# Altium PCB Termal controller.PcbDoc
Units mm, origin at the board's own origin, x right, y up, seen from the top; angles counter-clockwise.
Board outline 68.51 x 45.45 mm, 4 copper layers (Top Layer 1, Layer1, Layer 2, Bottom Layer 1), stack 0.603 mm thick; 72 components, 58 nets, 262 pads, 80 vias.
Unrouted connection lines stored in the file: 2.
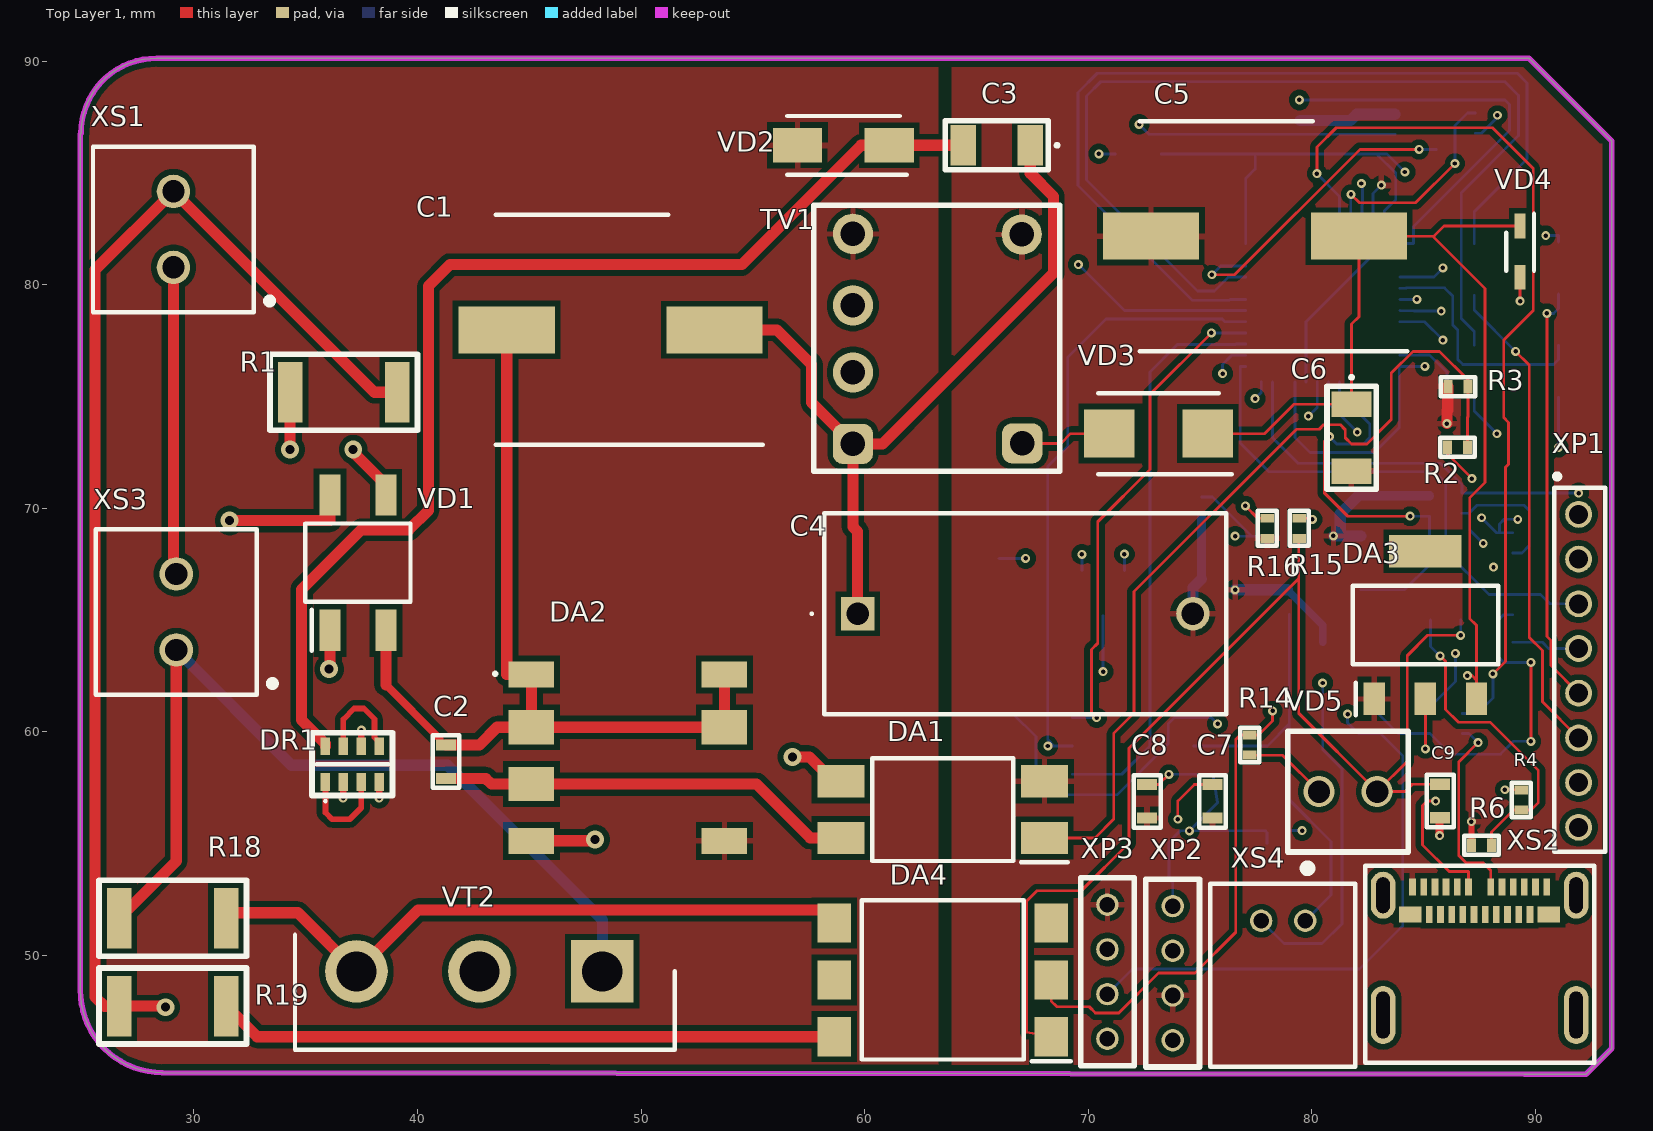
[diagram p0: Top Layer 1 view]
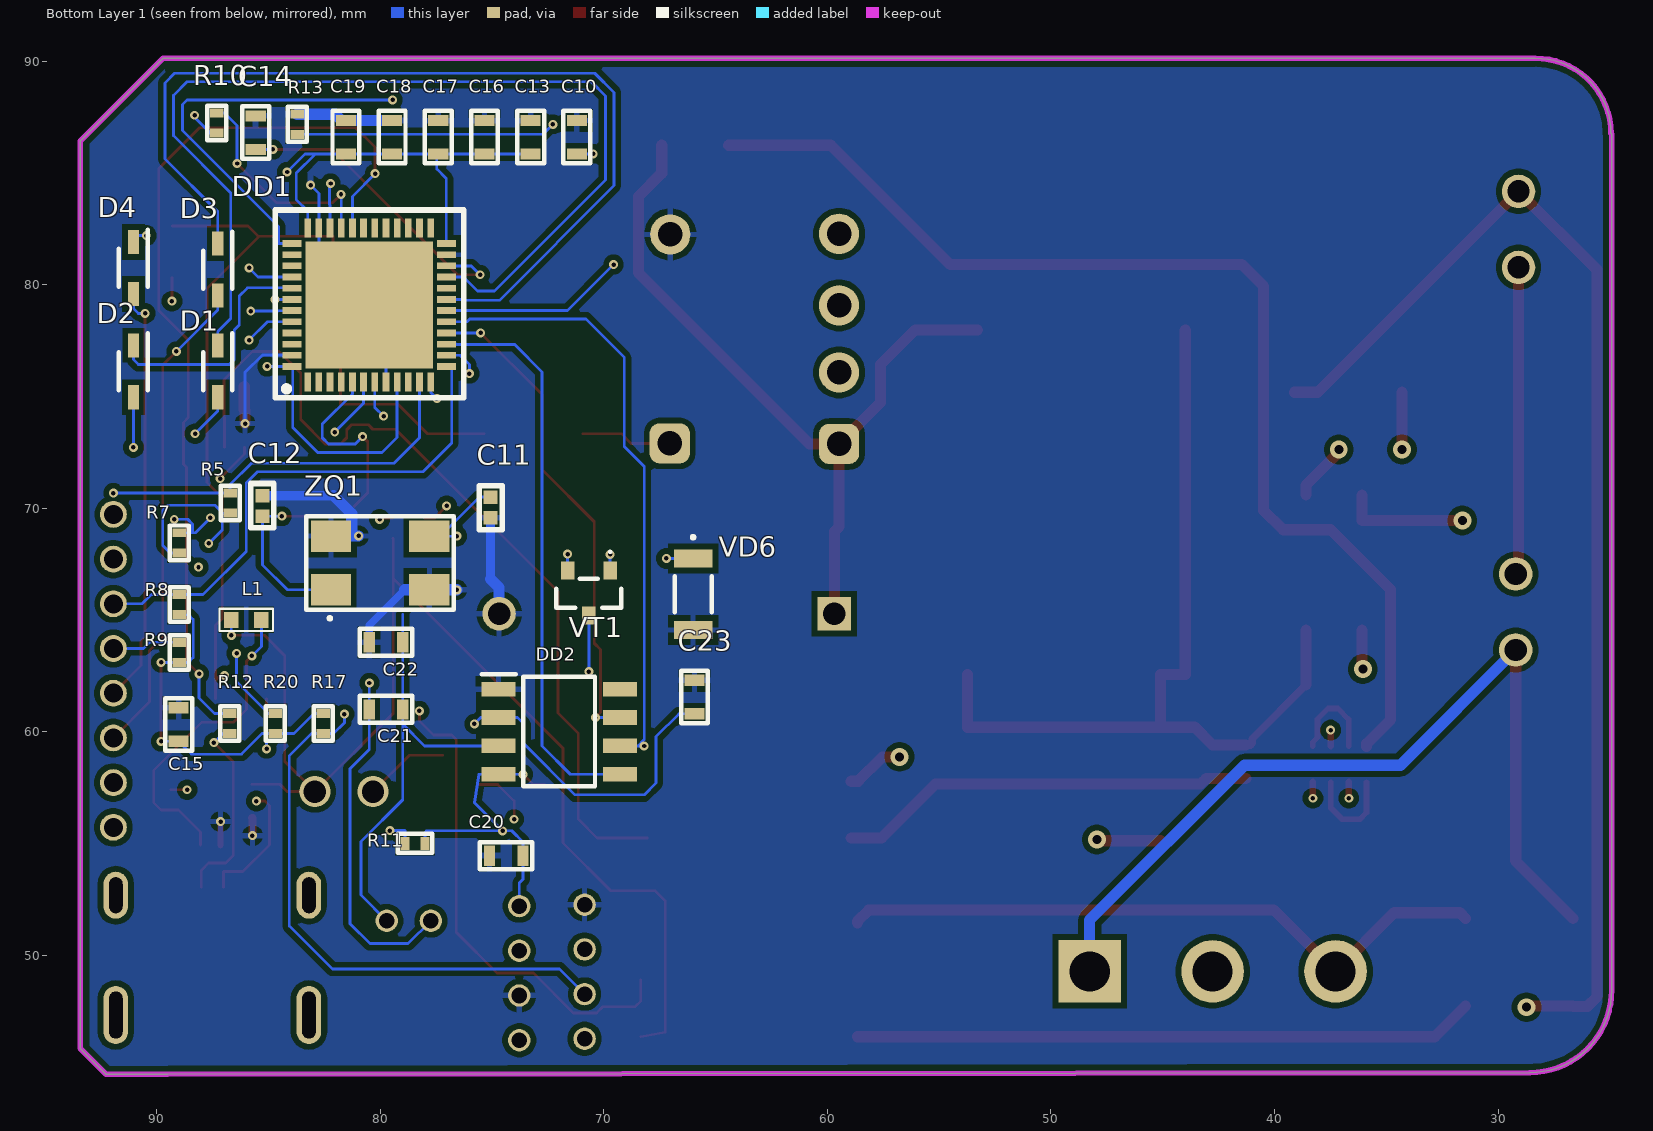
[diagram p1: Bottom Layer 1 view, seen from below]
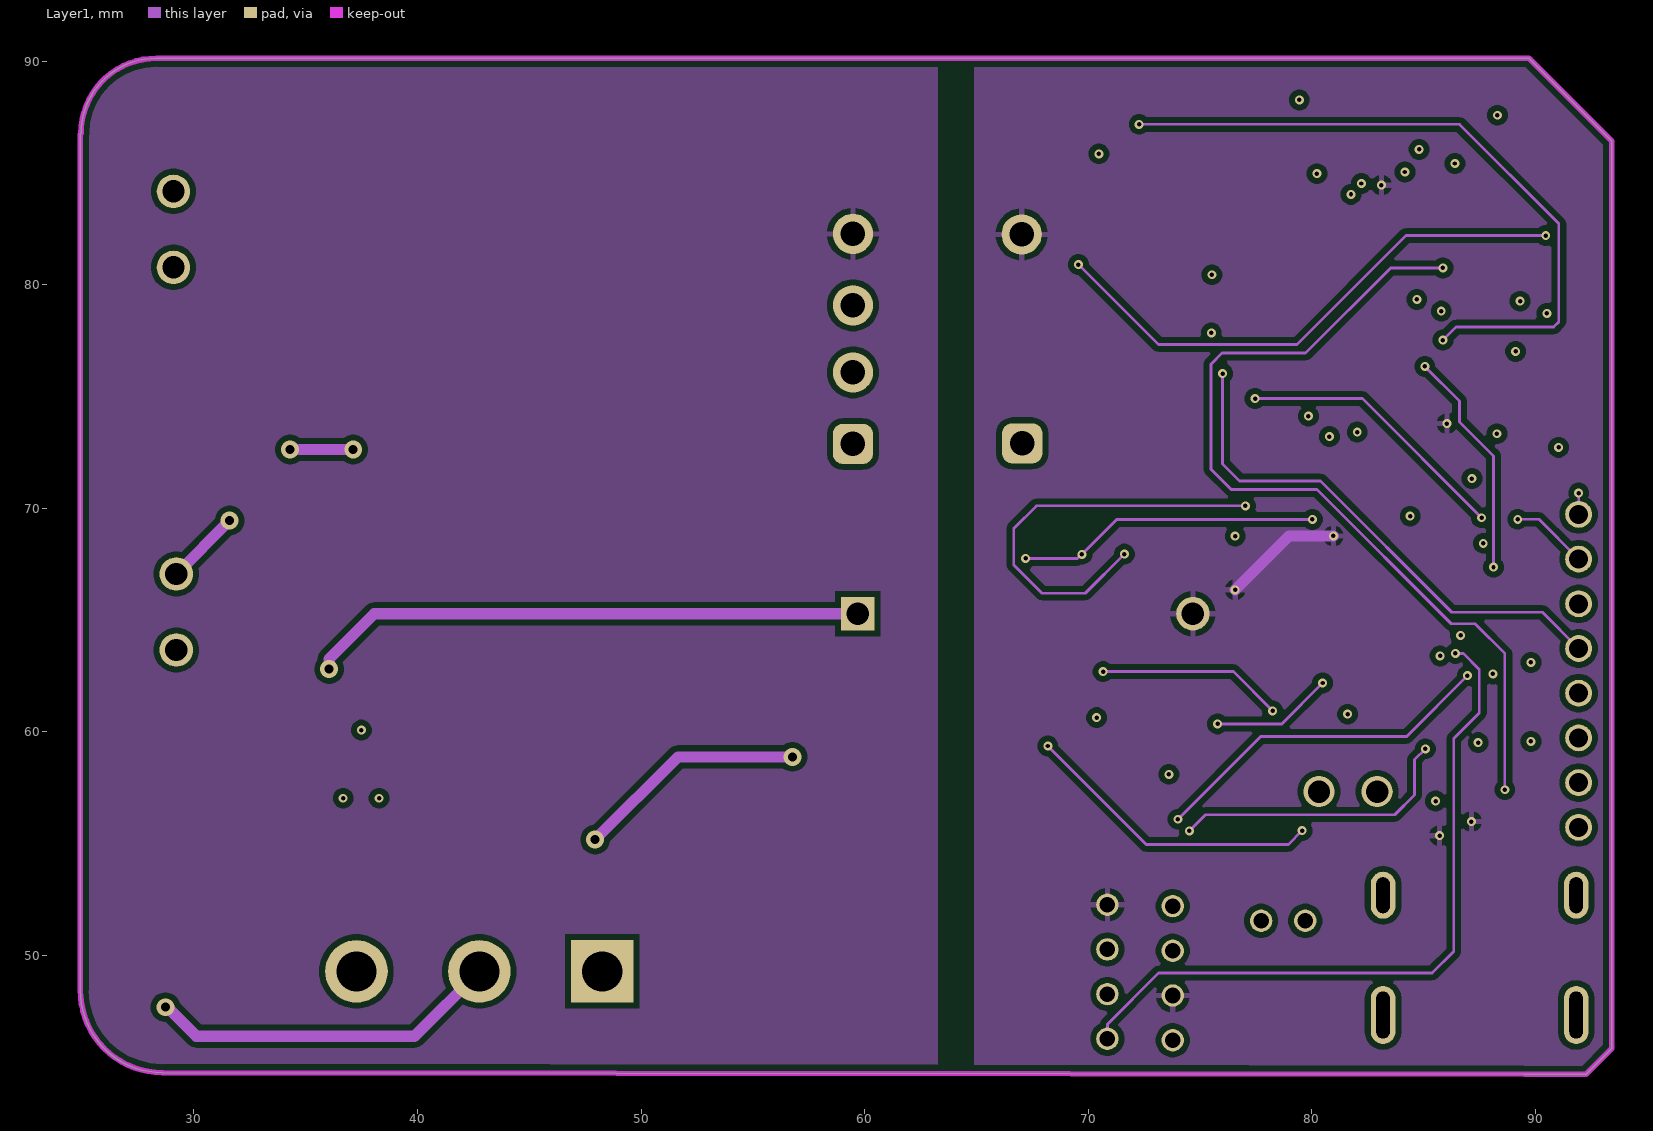
[diagram p2: Layer1]
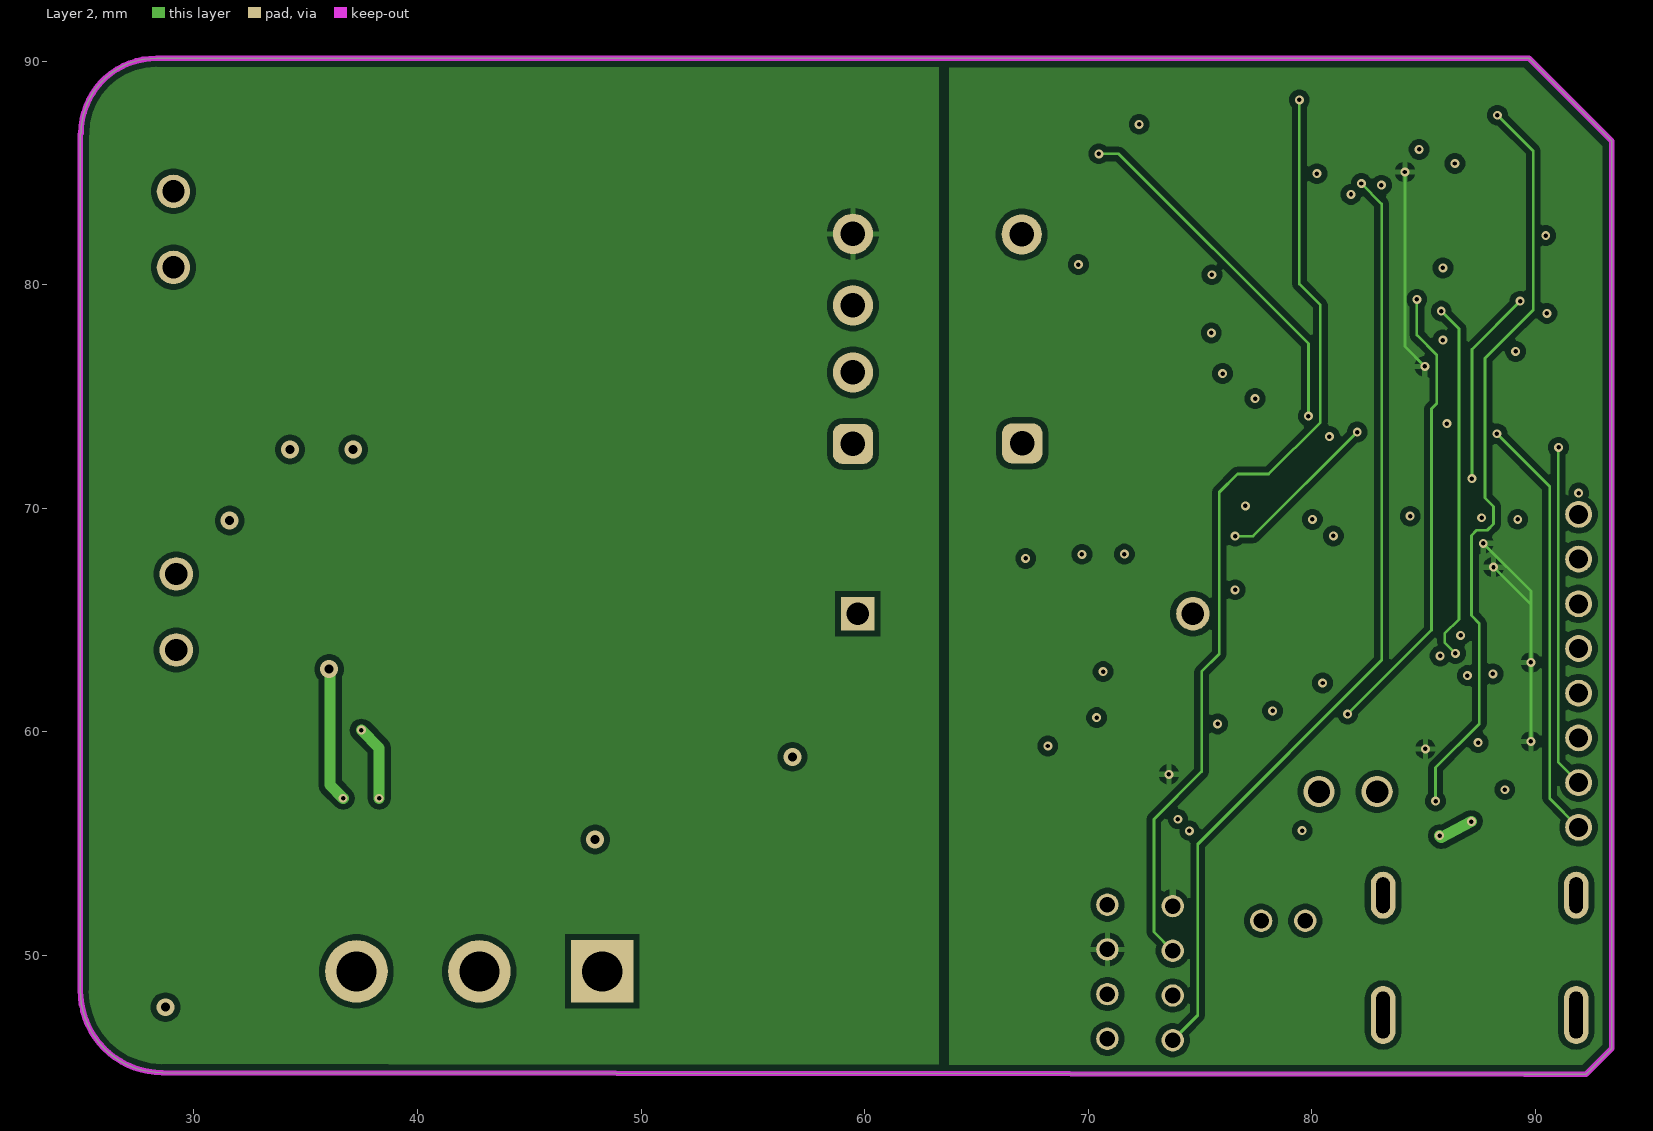
[diagram p3: Layer 2]
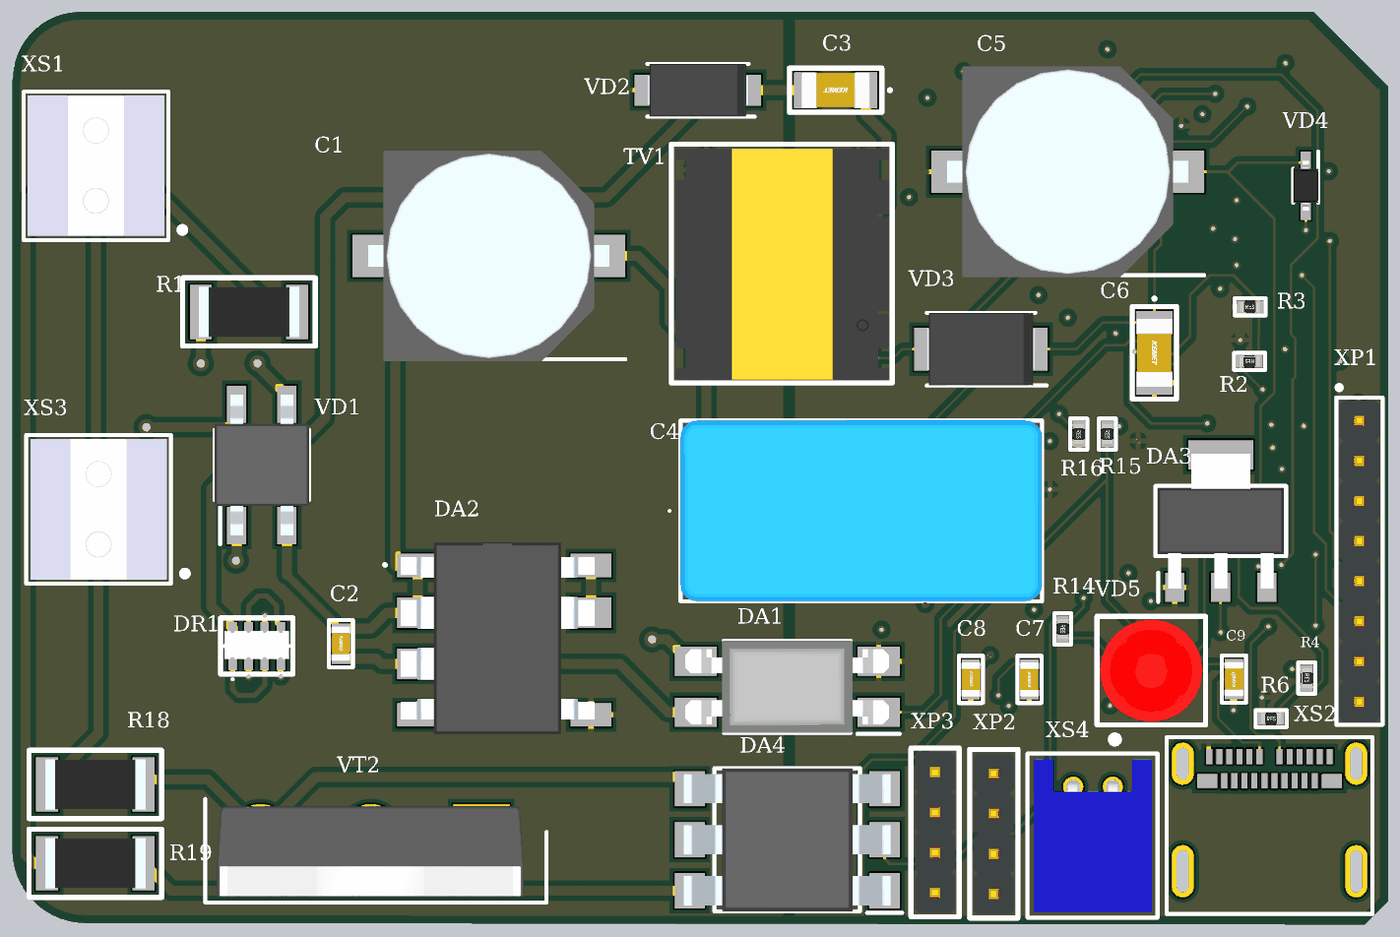
[diagram p4: 3D render of the assembled board from above, using the file's embedded part models]
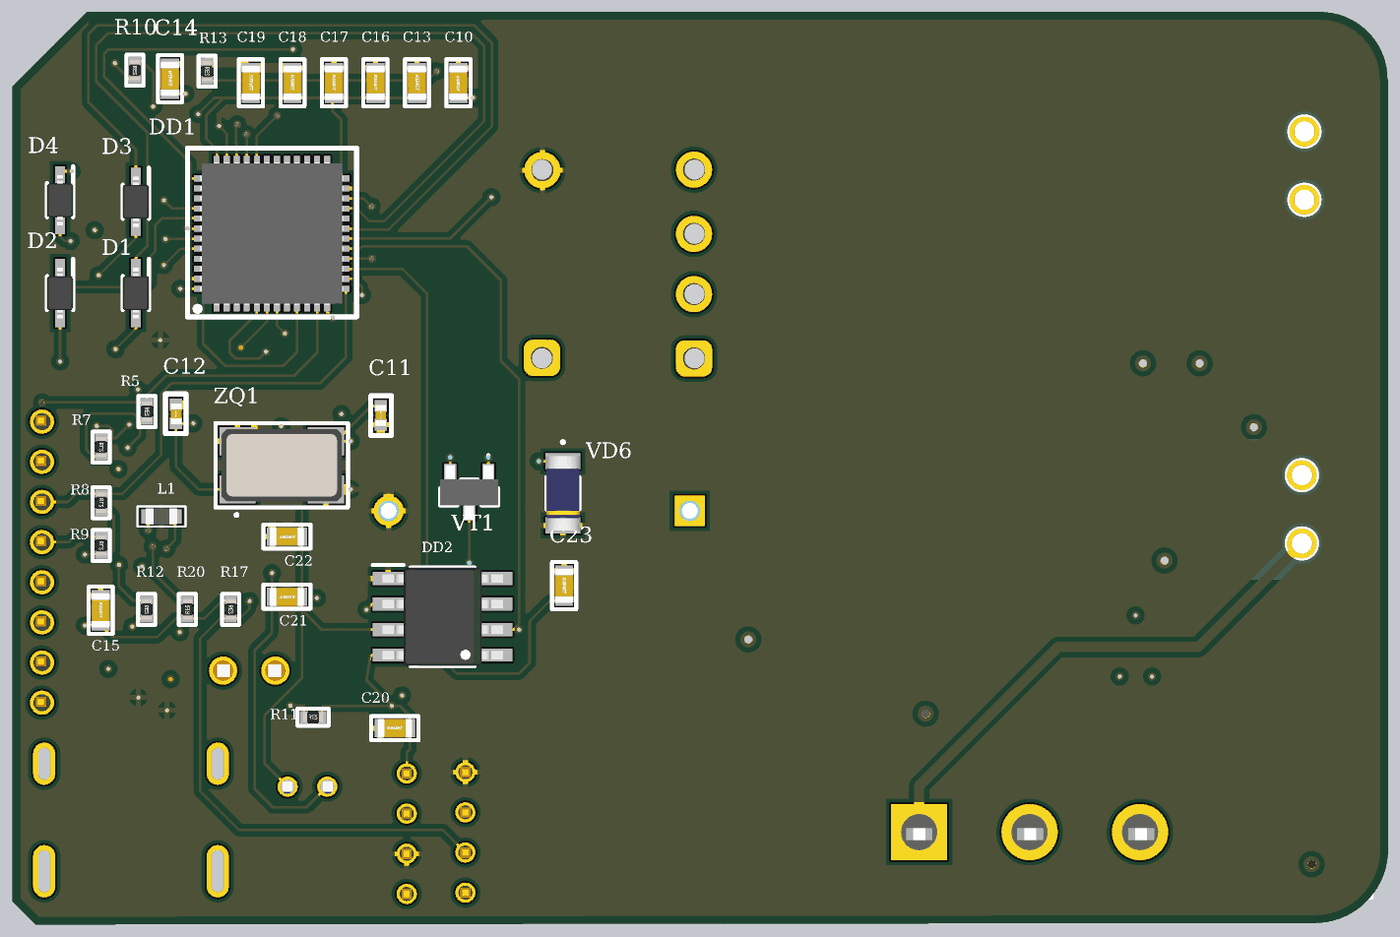
[diagram p5: 3D render of the assembled board from below, using the file's embedded part models]

## Layer stack, top to bottom
Top Solder: solder mask 0.0102, Solder Resist, Dk 3.5
Top Layer 1: signal copper 0.035
Dielectric 2: prepreg 0.0711, PP-006, Dk 4.1
Layer1: signal copper 0.0356
Dielectric 1: dielectric 0.32, FR-4, Dk 4.8
Layer 2: signal copper 0.0356
Dielectric 3: prepreg 0.0711, PP-006, Dk 4.1
Bottom Layer 1: signal copper 0.035
Bottom Solder: solder mask 0.0102, Solder Resist, Dk 3.5

## Board outline
28.58,44.749 cw(c28.58,48.409) 24.92,48.439 24.917,86.742 24.95,86.775 cw(c28.3,86.775) 28.328,90.125 89.55,90.125 89.725,90.125 93.425,86.425 93.425,45.825 92.275,44.675 89.522,44.675

## Design rules (kind name [scope] priority, off if disabled: settings)
Clearance "Clearance 220VAC" [OnLayer('Top Layer') vs (InComponent('C1') OR InComponent('C2') OR InComponent('C3') OR InComponent('C4') OR InComponent('DA1') OR InComponent('DA2') OR InComponent('DR1') OR InComponent('R1') OR InComponent('VD1') OR InComponent('VD2'))] p1: gap=2 ignorepadtopadclearanceinfootprint=TRUE
Clearance Clearance_1 [All] p2: gap=0.254 ignorepadtopadclearanceinfootprint=TRUE except(0: Arc-Hole Track-Hole SMDPad-Hole THPad-Hole Via-Hole Fill-Hole Poly-Hole Region-Hole Text-Hole)
PolygonConnect [All] p1: connectstyle=Relief reliefconductorwidth=0.254 reliefentries=4 polygonreliefangle="90 Angle" airgapwidth=0.254
RoutingVias [All] p1: holewidth=0.2 width=0.4 viastyle="Through Hole" minholewidth=0.2 minwidth=0.4 maxholewidth=0.2 maxwidth=0.4
SMDNeckDown [All] p1: percent=70.000
SolderMaskExpansion [All] p1: expansion=0.102 istentingtop=FALSE
UnRoutedNet [All] p1: checkbadconnections=TRUE
Width "Width VAC" [(InNet('NetC1_1') OR InNet('NetC1_2') OR InNet('NetC2_2') OR InNet('NetC3_2') OR InNet('NetDA1_3') OR InNet('NetDA2_5') OR InNet('NetR1_1') OR InNet('NetR1_2') OR InNet('NetVD1_4') OR InNet('NetDR1_1') OR InNet('NetDR1_4') OR InNet('NetDR1_5') OR InNet('DGND') OR InNet ('NetDA4_6')OR InNet ('NetR15_2'))] p1: maxlimit=0.5 minlimit=0.125 preferedwidth=0.5
Width Width_1 [All] p2: maxlimit=0.125 minlimit=0.125 preferedwidth=0.125
29 further rules are at their usual default settings.

## Classes and differential pairs
component class Power: C1 C2 C3 C4 C5 C6 C7 C8 DA1 DA2 DA3 DR1 R1 R2 R3 TV1 VD1 VD2 VD3 VD4 XS1
component class MCU: C9 C12 C13 C16 C18 C20 C21 C22 C23 D1 D2 D3 D4 DA4 DD1 DD2 L1 R4 R7 R8 R9 R11 R12 R15 R16 R18 R19 R20 VD5 VD6 VT1 VT2 XP1 XP2 XP3 XS2 XS3 XS4 ZQ1

## Components (designator, comment, footprint, x,y, rotation, side; value= is the part's Value field where it differs from the comment)
C1 "EEV-EB2G4R7Q" CAPAE1030X1700N 48.641,77.978 r180 top locked
C2 "06035C104JAT2A" С0603 41.275,59.412 r270 top locked value="0.1 мкФ"
C3 "CC1206KKX7RBBB222" C1206 65.913,86.233 r180 top locked value="2.2 нФ"
C4 "Конденсатор неполярный" B81123C1472M000 59.69,65.278 r0 top locked value="4.7 нФ"
C5 "EEV-EB2G4R7Q" CAPAE1030X1700N 77.47,82.169 r180 top locked
C6 "CC1206KKX5R7BB226" C1206 81.788,73.152 r270 top locked value=22
C7 "06035C104JAT2A" С0603 75.565,56.134 r90 top locked value="0.1 мкФ"
C8 "06035C104JAT2A" С0603 72.644,57.634 r270 top locked value="0.1 мкФ"
C9 "06035C104JAT2A" С0603 85.75,56.15 r90 top locked value="0.1 мкФ"
C10 "06035C104JAT2A" С0603 71.212,85.847 r90 bottom locked value="0.1 мкФ"
C11 "CC0603JRNPO9BN160" C0402 75.075,70.035 r270 bottom locked value="16 пФ"
C12 "CC0603JRNPO9BN160" C0402 85.275,70.1 r90 bottom locked value="16 пФ"
C13 "06035C104JAT2A" С0603 73.278,87.347 r270 bottom locked value="10 кОм"
C14 "06035C104JAT2A" С0603 85.575,87.55 r270 bottom locked value="4.7 мкФ"
C15 "06035C104JAT2A" С0603 89.027,61.071 r270 bottom locked value="10 кОм"
C16 "06035C104JAT2A" С0603 75.345,87.347 r270 bottom locked value="10 кОм"
C17 "06035C104JAT2A" С0603 77.411,87.347 r270 bottom locked value="10 кОм"
C18 "06035C104JAT2A" С0603 79.477,87.347 r270 bottom locked value="10 кОм"
C19 "06035C104JAT2A" С0603 81.544,87.347 r270 bottom locked value="10 кОм"
C20 "06035C104JAT2A" С0603 75.125,54.45 r180 bottom locked value="0.1 мкФ"
C21 "06035C104JAT2A" С0603 79,61 r0 bottom locked value="0.1 мкФ"
C22 "06035C104JAT2A" С0603 79,64 r0 bottom locked value="0.1 мкФ"
C23 "06035C104JAT2A" С0603 65.95,62.3 r270 bottom locked value="0.1 мкФ"
D1 "BAT42WS-7-F" SOD2513X120N 87.275,76.125 r270 bottom locked
D2 "BAT42WS-7-F" SOD2513X120N 91.05,76.125 r270 bottom locked
D3 "BAT42WS-7-F" SOD2513X120N 87.275,80.675 r270 bottom locked
D4 "BAT42WS-7-F" SOD2513X120N 91.05,80.75 r270 bottom locked
DA1 "LTV-817S-TA1" SOP254P1016X400-4N 63.5,56.515 r180 top locked
DA2 "LNK364GN-TL" LNK364GNTL 49.414,58.928 r270 top locked
DA3 "AMS1117-3.3" SOT229P700X180-4N 85.09,64.77 r90 top locked
DA4 "EL3063S_TA_" SOP254P1030X460-6N 63.5,48.895 r180 top
DD1 "STM32F411CEU6" QFN50P700X700X60-49N-D 80.502,79.089 r90 bottom locked
DD2 "MAX6675ISA" SOIC127P600X175-8N 72,60 r180 bottom locked
DR1 "YC164-JR-0727KL" CAT161000F4 37.084,58.547 r0 top locked value=27K
L1 "BLM18AG102SN1D" BLM18SP221SN1B 86,65 r0 bottom locked
R1 "CRGS2010J10R" RESC5025X65N 36.703,75.184 r180 top locked value=12
R2 "RC0402FR-07390RL" R0402 86.975,72.725 r180 top locked value=390
R3 "RC0402FR-07680RL" R0402 86.095,75.438 r0 top locked value=680
R4 "R0402" R0402 89.375,57.4 r270 top locked value=100
R5 "R0402" R0402 86.725,70.675 r270 bottom locked value="10 кОм"
R6 "R0402" R0402 87.15,54.925 r0 top locked value=10K
R7 "R0402" R0402 89,68.9 r270 bottom locked value="10 кОм"
R8 "R0402" R0402 89,66.134 r270 bottom locked value="10 кОм"
R9 "R0402" R0402 89,64 r270 bottom locked value="10 кОм"
R10 "R0402" R0402 87.325,87.675 r270 bottom locked value="10 кОм"
R11 "R0402" R0402 78.9,55 r180 bottom locked value="10 кОм"
R12 "R0402" R0402 86.741,60.817 r270 bottom locked value="10 кОм"
R13 "R0402" R0402 83.725,87.625 r270 bottom locked value="10 кОм"
R14 "R0402" R0402 77.225,59.849 r270 top locked value=10K
R15 "R0402" R0402 79.444,69.55 r270 top locked value=10K
R16 "R0402" R0402 78.019,69.55 r270 top locked value=1K
R17 "R0402" R0402 82.55,60.817 r270 bottom locked value="10 кОм"
R18 "RC2010JK-07330RL" RESC5025X65N 29.05,51.65 r180 top locked value=330
R19 "RC2010FK-07100RL" RESC5025X65N 29.05,47.725 r180 top locked value=100
R20 "R0402" R0402 84.709,59.917 r90 bottom locked value="10 кОм"
TV1 "EE10-A1" EE10-A1 56.531,83.648 r270 top locked
VD1 "MB6S" SOP250P700X190-4N 37.338,67.564 r90 top locked
VD2 "RS1M" DIOM5026X262N 59.055,86.233 r180 top locked
VD3 "NRVBSS26NT3G" DIOM5436X247N 73.152,73.332 r180 top locked
VD4 "BZX384-C5V6" SOD2512X110N 89.325,81.475 r270 top locked
VD5 "LED" "LED Red 5 мм" 81.931,57.42 r270 top locked
VD6 "ZMM5225B" TMMDB3TG 66.01,66.151 r270 bottom locked
VT1 "MMBT5551" MMBT5551 70.675,66.2 r0 bottom locked
VT2 "BTA24-800CWRG" TO255P460X1020X2005-3P 48.27,49.276 r180 top locked
XP1 "PLS3" PLS8 91.948,69.722 r0 top locked
XP2 "Разъем SWD" PLS4 73.787,52.197 r0 top locked
XP3 "Разъем I2C (дисплей)" PLS4 70.866,52.26 r0 top locked
XS1 "S2B-PH-K-S" ED350V-02P 29.083,84.972 r0 top locked
XS2 "Разъем USB TYPE-C" "Разъем USB TYPE-C, 1054500101" 83.197,47.325 r0 top locked
XS3 "Нагрузка" ED350V-02P 29.21,67.856 r0 top locked
XS4 "Термопара" S2B-PH-K-S 81.668,51.189 r270 top locked
ZQ1 "ABMM2-8.000MHZ-E2-T" ABMM2 80.01,67.548 r180 bottom locked

## Footprints (in the part's own frame and the unit in brackets; to place one, negate y for a bottom-side part, rotate by r counter-clockwise, add the part's x,y. Pads: shape width x height; smd on the part's side, far side on the other; paste and mask are expansions set on the pad)
ABMM2 [mm]
  rect 1.8x1.4 smd: 1(-2.2,-1.2) 2(2.2,-1.2) 3(2.2,1.2) 4(-2.2,1.2)
  silkscreen extent -3.3,-2.52 3.3,2.1, body extent -3,-1.8 3,1.8, height 1.2
B81123C1472M000 [mm]
  rect 1.5x1.5 hole 1: 1(0,0)
  round 1.5 hole 1: 2(15,0)
  silkscreen extent -2.1,-4.5 16.5,4.5, body extent -1.5,-4.5 16.5,4.5, height 17.4
BLM18SP221SN1B [mm]
  rect 0.65x0.7 smd: 1(-0.675,0) 2(0.675,0)
  silkscreen extent -1.2,-0.5 1.2,0.5, body extent -0.8,-0.4 0.8,0.4, height 0.8
C0402 [mm]
  rect 0.6x0.62 smd: 1(-0.46,0) 2(0.46,0)
  silkscreen extent -0.98,-0.5 1,0.52, body extent -0.52,-0.28 0.53,0.27, height 0.55
C1206 [mm]
  rect 1.15x1.8 smd: 1(-1.5,0) 2(1.5,0)
  silkscreen extent -2.75,-1.1 2.3,1.1, body extent -1.7,-0.9 1.7,0.9, height 0.88
CAPAE1030X1700N [mm]
  rect 4.3x2.1 smd: 1(-4.65,0) 2(4.65,0)
  silkscreen extent -6.8,-5.15 5.15,5.15, body extent -6,-5.25 6,5.25, height 17
CAT161000F4 [mm]
  rect 0.425x0.8 smd: 1(-1.2,-0.8) 2(-0.4,-0.8) 3(0.4,-0.8) 4(1.2,-0.8) 5(1.2,0.8) 6(0.4,0.8) 7(-0.4,0.8) 8(-1.2,0.8)
  silkscreen extent -1.8,-1.7 1.8,1.4, body extent -1.6,-0.65 1.6,0.75, height 0.5
DIOM5026X262N [mm]
  rect 2.2x1.55 smd: 1(-2.05,0) 2(2.05,0)
  silkscreen extent -2.82,-1.31 2.52,1.31, body extent -2.52,-1.31 2.52,1.31, height 2.62
DIOM5436X247N [mm]
  rect 2.25x2.15 smd: 1(-2.2,0) 2(2.2,0)
  silkscreen extent -3.28,-1.81 2.7,1.81, body extent -2.7,-1.81 2.7,1.81, height 2.47
ED350V-02P [mm]
  round 1.5 hole 1: 1(0,-0.8) 2(0,-4.2)
  silkscreen extent -3.6,-6.2 4.44,1.2, body extent -3.4,-6 3.4,1, height 2.5
EE10-A1 [mm]
  rrect50% 1.8x1.8 hole 1.1: 1(10.775,2.95) 8(10.75,10.525)
  round 1.8 hole 1.1: 2(7.575,2.95) 3(4.575,2.95) 4(1.375,2.95) 5(1.4,10.5)
  silkscreen extent 0.1,1.2 12,12.2, body extent 0.33,1.43 11.82,12.03, height 11.8
"LED Red 5 мм" [mm]
  round 1.4 hole 1: 1(0.1,1) 2(0.1,-1.6)
  silkscreen extent -2.6,-3 2.8,2.4, body extent -2.45,-2.85 2.65,2.25, height 8.6
LNK364GNTL [mil]
  rect 45.98x80 smd: 1(-142.99,-170) 4(150,-170) 5(150,170) 8(-142.99,170)
  rect 60x80 smd: 2(-50,-170) 3(50,-170) 7(-50,170)
  silkscreen extent -147,-237 -141,-231, body extent -188,-203 188,177, height 157
MMBT5551 [mm]
  rect 0.6x0.8 smd: 1(-0.95,-1.01) 2(0.95,-1.01) 3(0,1.01)
  silkscreen extent -1.45,-1.9 1.45,0.65, body extent -1.45,-1.35 1.45,1.35, height 1.25
PLS4 [mm]
  round 1 hole 0.7: 1(0,0) 2(0,-2) 3(0,-4) 4(0,-6)
  silkscreen extent -1.2,-7.2 1.2,1.2, body extent -1,-7 1,1, height 6
PLS8 [mm]
  round 1.2 hole 0.85: 1(0,0) 2(0,-2) 3(0,-4) 4(0,-6) 5(0,-8) 6(0,-10) 7(0,-12) 8(0,-14)
  silkscreen extent -1.1,-15.1 1.2,1.8, body extent -0.95,-14.95 1.05,1.05, height 6.3
QFN50P700X700X60-49N-D [mm]
  rect 0.85x0.3 smd: 1(-3.45,2.75) 2(-3.45,2.25) 3(-3.45,1.75) 4(-3.45,1.25) 5(-3.45,0.75) 6(-3.45,0.25) 7(-3.45,-0.25) 8(-3.45,-0.75) 9(-3.45,-1.25) 10(-3.45,-1.75) 11(-3.45,-2.25) 12(-3.45,-2.75) 25(3.45,-2.75) 26(3.45,-2.25) 27(3.45,-1.75) 28(3.45,-1.25) 29(3.45,-0.75) 30(3.45,-0.25) 31(3.45,0.25) 32(3.45,0.75) 33(3.45,1.25) 34(3.45,1.75) 35(3.45,2.25) 36(3.45,2.75)
  rect 0.3x0.85 smd: 13(-2.75,-3.45) 14(-2.25,-3.45) 15(-1.75,-3.45) 16(-1.25,-3.45) 17(-0.75,-3.45) 18(-0.25,-3.45) 19(0.25,-3.45) 20(0.75,-3.45) 21(1.25,-3.45) 22(1.75,-3.45) 23(2.25,-3.45) 24(2.75,-3.45) 37(2.75,3.45) 38(2.25,3.45) 39(1.75,3.45) 40(1.25,3.45) 41(0.75,3.45) 42(0.25,3.45) 43(-0.25,3.45) 44(-0.75,3.45) 45(-1.25,3.45) 46(-1.75,3.45) 47(-2.25,3.45) 48(-2.75,3.45)
  rect 5.7x5.7 smd: 49(0,0)
  silkscreen extent -4.15,-4.22 4.25,4.2, body extent -3.55,-3.55 3.55,3.55, height 0.6
R0402 [mm]
  rect 0.4x0.6 smd: 1(0,0) 2(0.9,0)
  silkscreen extent -0.33,-0.43 1.23,0.42, body extent -0.05,-0.25 0.95,0.25, height 0.3
RESC5025X65N [mm]
  rect 1.1x2.7 smd: 1(-2.4,0) 2(2.4,0)
  silkscreen extent -3.3,-1.7 3.3,1.7, body extent -2.5,-1.25 2.5,1.25, height 0.65
S2B-PH-K-S [mm]
  round 1 hole 0.7: 1(-0.35,-1.95) 2(-0.35,-3.925)
  silkscreen extent -2.85,-6.2 6.18,0.28, body extent -1.7,-5.9 5.9,0, height 4.9
SOD2512X110N [mm]
  rect 1.1x0.5 smd: 1(-1.15,0) 2(1.15,0)
  silkscreen extent -1.7,-0.63 0.85,0.62, body extent -1.24,-0.62 1.24,0.63, height 0.93
SOD2513X120N [mm]
  rect 1.075x0.5 smd: 1(-1.162,0) 2(1.162,0)
  silkscreen extent -1.7,-0.65 0.85,0.65, body extent -1.26,-0.65 1.26,0.65, height 1.11
SOIC127P600X175-8N [mm]
  rect 1.525x0.65 smd: 1(-2.712,1.905) 2(-2.712,0.635) 3(-2.712,-0.635) 4(-2.712,-1.905) 5(2.712,-1.905) 6(2.712,-0.635) 7(2.712,0.635) 8(2.712,1.905)
  silkscreen extent -3.48,-2.45 1.6,2.58, body extent -3,-2.45 3,2.45, height 1.67
SOP250P700X190-4N [mm]
  rect 1.85x0.95 smd: 1(-3.025,1.25) 2(-3.025,-1.25) 3(3.025,-1.25) 4(3.025,1.25)
  silkscreen extent -3.95,-2.35 1.75,2.35, body extent -3.5,-2.35 3.5,2.35, height 1.9
SOP254P1016X400-4N [mm]
  rect 2.1x1.45 smd: 1(-4.55,1.27) 2(-4.55,-1.27) 3(4.55,-1.27) 4(4.55,1.27)
  silkscreen extent -5.6,-2.3 3.15,2.34, body extent -5.08,-2.3 5.08,2.3, height 3.85
SOP254P1030X460-6N [mm]
  rect 1.5x1.75 smd: 1(-4.85,2.54) 2(-4.85,0) 3(-4.85,-2.54) 4(4.85,-2.54) 5(4.85,0) 6(4.85,2.54)
  silkscreen extent -5.73,-3.56 3.62,3.64, body extent -5.15,-3.56 5.15,3.56, height 4.6
SOT229P700X180-4N [mm]
  rect 1.45x0.95 smd: 1(-3.3,2.29) 2(-3.3,0) 3(-3.3,-2.29)
  rect 1.45x3.25 smd: 4(3.3,0)
  silkscreen extent -4.02,-3.25 1.75,3.25, body extent -3.35,-3.15 3.35,3.15, height 1.8
TMMDB3TG [mm]
  rect 0.8x1.72 smd: 1(-1.6,0) 2(1.6,0)
  silkscreen extent -2.6,-0.82 0.8,0.82, body extent -1.85,-0.85 1.85,0.85, height 1.7
TO255P460X1020X2005-3P [mm]
  rect 2.8x2.8 hole 1.8: 1(0,0)
  round 2.8 hole 1.8: 2(5.5,0) 3(11,0)
  silkscreen extent -3.25,-1.65 13.75,3.5, body extent -2.12,-1.3 13.18,3.2, height 21.47
"Разъем USB TYPE-C, 1054500101" [mm]
  rect 0.3x0.76 smd: A1(1.32,5.72) A2(1.82,5.72) A3(2.32,5.72) A4(2.82,5.72) A5(3.32,5.72) A6(3.82,5.72) A7(4.82,5.72) A8(5.32,5.72) A9(5.82,5.72) A10(6.32,5.72) A11(6.82,5.72) A12(7.32,5.72) B2(6.57,4.5) B3(6.07,4.5) B4(5.57,4.5) B5(5.07,4.5) B6(4.57,4.5) B7(4.07,4.5) B8(3.57,4.5) B9(3.07,4.5) B10(2.57,4.5) B11(2.07,4.5)
  rect 1x0.7 smd: B1(7.42,4.5) B12(1.22,4.5)
  oval 1.1x2.1 hole 0.6 slot 1.6 at 90 deg: MH4(0,5.36) MH4(8.64,5.36)
  oval 1.1x2.6 hole 0.6 slot 2.1 at 90 deg: MH5(0,0) MH5(8.64,0)
  silkscreen extent -0.8,-2.12 9.45,6.67, body extent -0.15,-1.9 8.8,6, height 3.18
С0603 [mm]
  rect 0.5x0.9 smd: 1(0,0) 2(1.5,0)
  silkscreen extent -0.43,-0.6 1.92,0.6, body extent -0.12,-0.48 1.63,0.48, height 0.86

## Part data
C1: "Capacitor Polarised", Manufacturer_Name=Panasonic, Mouser Part Number=667-EEV-EB2G4R7Q, Arrow Part Number=EEV-EB2G4R7Q, Arrow Price/Stock=https://www.arrow.com/en/products/eeveb2g4r7q/panasonic?region=nac, Datasheet Link=http://industrial.panasonic.com/cdbs/www-data/pdf/RDE0000/ABA0000C1202.pdf, Height=17mm, Manufacturer_Part_Number=EEV-EB2G4R7Q, Mouser Price/Stock=https://www.mouser.co.uk/ProductDetail/Panasonic/EEV-EB2G4R7Q?qs=h4ONpho3ypMX7%2FLtZhu%252BqQ%3D%3D
C2 C7 C8 C9 C20 C21 C22 C23: library part "Конденсатор неполярный", "Керамический ЧИП-конденсатор 0603 X7R 0.1мкФ ±5% 50В", Manufacturer_Name=KEMET, Manufacturer_Part_Number=CC0402KRX7R7BB222, Datasheet Link=https://componentsearchengine.com/Datasheets/34/CC0402KRX7R7BB222.pdf, Height=0.55mm
C3: library part "Конденсатор неполярный", "Керамический ЧИП-конденсатор 1206 X7R 2200пФ ±10% 500В", Manufacturer_Name=KEMET, Manufacturer_Part_Number=CC0402KRX7R7BB222, Datasheet Link=https://componentsearchengine.com/Datasheets/34/CC0402KRX7R7BB222.pdf, Height=0.55mm
C4: "Capacitor", Manufacturer_Name=KEMET, Manufacturer_Part_Number=CC0402KRX7R7BB222, Datasheet Link=https://componentsearchengine.com/Datasheets/34/CC0402KRX7R7BB222.pdf, Height=0.55mm
C5: library part "Конденсатор полярный", "Capacitor Polarised", Manufacturer_Name=Panasonic, Mouser Part Number=667-EEV-EB2G4R7Q, Arrow Part Number=EEV-EB2G4R7Q, Arrow Price/Stock=https://www.arrow.com/en/products/eeveb2g4r7q/panasonic?region=nac, Datasheet Link=http://industrial.panasonic.com/cdbs/www-data/pdf/RDE0000/ABA0000C1202.pdf, Height=17mm, Manufacturer_Part_Number=EEV-EB2G4R7Q, Mouser Price/Stock=https://www.mouser.co.uk/ProductDetail/Panasonic/EEV-EB2G4R7Q?qs=h4ONpho3ypMX7%2FLtZhu%252BqQ%3D%3D
C6: library part "Конденсатор неполярный", "Керамический ЧИП-конденсатор 1206 X5R 22мкФ ±10% 16В", Manufacturer_Name=KEMET, Manufacturer_Part_Number=CC0402KRX7R7BB222, Datasheet Link=https://componentsearchengine.com/Datasheets/34/CC0402KRX7R7BB222.pdf, Height=0.55mm
C10 C13 C14 C15 C16 C17 C18 C19: library part "Конденсатор неполярный", "Capacitor", Manufacturer_Name=KEMET, Manufacturer_Part_Number=CC0402KRX7R7BB222, Datasheet Link=https://componentsearchengine.com/Datasheets/34/CC0402KRX7R7BB222.pdf, Height=0.55mm
C11 C12: library part "Конденсатор неполярный", "16пФ ±5% 50В", Manufacturer_Name=KEMET, Manufacturer_Part_Number=CC0402KRX7R7BB222, Datasheet Link=https://componentsearchengine.com/Datasheets/34/CC0402KRX7R7BB222.pdf, Height=0.55mm
D1 D2 D3 D4: "Diode", Manufacturer_Name="Diodes Incorporated", Mouser Part Number=621-BAT42WS-F, Arrow Part Number=BAT42WS-7-F, Arrow Price/Stock=https://www.arrow.com/en/products/bat42ws-7-f/diodes-incorporated?utm_currency=USD&region=europe, Datasheet Link=https://www.diodes.com//assets/Datasheets/ds30100.pdf, Height=1.2mm, Manufacturer_Part_Number=BAT42WS-7-F, Mouser Price/Stock=https://www.mouser.co.uk/ProductDetail/Diodes-Incorporated/BAT42WS-7-F?qs=m4hD82FvRu0XtK2r8jLwYA%3D%3D
DA1: "Integrated Circuit", Manufacturer_Name=Lite-On, Mouser Part Number=859-LTV-817S-TA1, Arrow Part Number=LTV-817S-TA1, Arrow Price/Stock=https://www.arrow.com/en/products/ltv-817s-ta1/lite-on-technology?utm_currency=USD&region=nac, Datasheet Link=http://optoelectronics.liteon.com/upload/download/DS-70-96-0016/LTV-8X7%20series%20201610%20.pdf, Height=4mm, Manufacturer_Part_Number=LTV-817S-TA1, Mouser Price/Stock=https://www.mouser.co.uk/ProductDetail/Lite-On/LTV-817S-TA1?qs=gnaPJ2cis705dA%252BrXNgReQ%3D%3D
DA2: "AC-DC контроллер", Manufacturer_Name="Power Integrations", Mouser Part Number=869-LNK364GN-TL, Datasheet Link=https://www.power.com/sites/default/files/product-docs/lnk362-364.pdf, Height=3.68mm, Manufacturer_Part_Number=LNK364GN-TL, Mouser Price/Stock=https://www.mouser.co.uk/ProductDetail/Power-Integrations/LNK364GN-TL?qs=Jph8NoUxIfUMH738%2FE3y8A%3D%3D
DA3: "Integrated Circuit", Manufacturer_Name=Advanced, Datasheet Link=https://datasheet.datasheetarchive.com/originals/distributors/Datasheets-28/DSA-550594.pdf, Height=1.8mm, Manufacturer_Part_Number=AMS1117-3.3
DA4: "Integrated Circuit", Arrow Part Number=EL3063S(TA), Manufacturer_Name=Everlight, Mouser Part Number=638-EL3063STA, Arrow Price/Stock=https://www.arrow.com/en/products/el3063s-ta/everlight-electronics, Datasheet Link=https://www.mouser.com/datasheet/2/143/EL303X_EL304X_EL306X_EL308X-515384.pdf, Height=4.6mm, Manufacturer_Part_Number=EL3063S(TA), Mouser Price/Stock=https://www.mouser.com/Search/Refine.aspx?Keyword=638-EL3063STA
DD1: "Integrated Circuit", Manufacturer_Name=STMicroelectronics, Mouser Part Number=511-STM32F411CEU6, Arrow Part Number=STM32F411CEU6, Arrow Price/Stock=https://www.arrow.com/en/products/stm32f411ceu6/stmicroelectronics?utm_currency=USD&region=nac, Datasheet Link=https://www.st.com/resource/en/datasheet/stm32f411ce.pdf, Height=0.6mm, Manufacturer_Part_Number=STM32F411CEU6, Mouser Price/Stock=https://www.mouser.co.uk/ProductDetail/STMicroelectronics/STM32F411CEU6?qs=pjMTYa9MTGV3ou31YBFa3g%3D%3D
DD2: "Integrated Circuit", Manufacturer_Name="Analog Devices", Mouser Part Number=N/A, Datasheet Link=http://datasheets.maximintegrated.com/en/ds/MAX6675.pdf, Height=1.75mm, Manufacturer_Part_Number=MAX6675ISA, Mouser Price/Stock=https://www.mouser.com/Search/Refine.aspx?Keyword=N%2FA
DR1: library part "Резисторная сборка 4", "Resistor Network", Arrow Part Number=CAT16-2702F4LF, Manufacturer_Name=Bourns, Mouser Part Number=652-CAT16-2702F4LF, Arrow Price/Stock=https://www.arrow.com/en/products/cat16-2702f4lf/bourns, Datasheet Link=https://bourns.com/docs/product-datasheets/catcay.pdf?sfvrsn=eae9f7ea_24, Height=0.6mm, Manufacturer_Part_Number=CAT16-2702F4LF, Mouser Price/Stock=http://www.mouser.com/Search/ProductDetail.aspx?qs=2cU%252bdy8NdRo19krE2bXLqQ%3d%3d
L1: "Ferrite Bead", Manufacturer_Name="Murata Electronics", Mouser Part Number=81-BLM11A102S, Arrow Part Number=BLM18AG102SN1D, Arrow Price/Stock=https://www.arrow.com/en/products/blm18ag102sn1d/murata-manufacturing?utm_currency=USD&region=nac, Datasheet Link=http://www.murata.com/~/media/webrenewal/support/library/catalog/products/emc/emifil/c31e.ashx?la=en-gb, Height=0.95mm, Manufacturer_Part_Number=BLM18AG102SN1D, Mouser Price/Stock=https://www.mouser.co.uk/ProductDetail/Murata-Electronics/BLM18AG102SN1D?qs=b2kFoOhrN4V4XjRBmusv4w%3D%3D
R1: "Resistor", Manufacturer_Name="TE Connectivity", Mouser Part Number=279-CRGS2010J10R, Arrow Part Number=CRGS2010J10R, Arrow Price/Stock=https://www.arrow.com/en/products/crgs2010j10r/te-connectivity?utm_currency=USD&region=nac, Datasheet Link=http://www.te.com/commerce/DocumentDelivery/DDEController?Action=showdoc&DocId=Data+Sheet%7F9-1773463-8%7FB%7Fpdf%7FEnglish%7FENG_DS_9-1773463-8_B.pdf%7F3-2176251-0, Height=0.65mm, Manufacturer_Part_Number=CRGS2010J10R, Mouser Price/Stock=https://www.mouser.co.uk/ProductDetail/TE-Connectivity-Holsworthy/CRGS2010J10R?qs=Rv6LVDxB0ZqF0MPdEdt49w%3D%3D
R2: library part Резистор, "Толстопленочный ЧИП-резистор 0402 390Ом ±1% 0.063Вт -55°С...+155°С", Units=Ом
R3: library part Резистор, "олстопленочный ЧИП-резистор 0402 680Ом ±1% 0.063Вт -55°С...+155°С", Units=Ом
R4 R5 R6 R7 R8 R9 R10 R11 R12 R13 R14 R15 R16 R17 R20: library part Резистор, Units=Ом
R18 R19: library part "Резистор 2 Вт", "Resistor", Arrow Part Number=CRGS2010J10R, Manufacturer_Name="TE Connectivity", Mouser Part Number=279-CRGS2010J10R, Arrow Price/Stock=https://www.arrow.com/en/products/crgs2010j10r/te-connectivity?utm_currency=USD&region=nac, Datasheet Link=http://www.te.com/commerce/DocumentDelivery/DDEController?Action=showdoc&DocId=Data+Sheet%7F9-1773463-8%7FB%7Fpdf%7FEnglish%7FENG_DS_9-1773463-8_B.pdf%7F3-2176251-0, Height=0.65mm, Manufacturer_Part_Number=CRGS2010J10R, Mouser Price/Stock=https://www.mouser.co.uk/ProductDetail/TE-Connectivity-Holsworthy/CRGS2010J10R?qs=Rv6LVDxB0ZqF0MPdEdt49w%3D%3D
TV1: "Импульсный трансформатор 220V; 5-12V; P=1-3W; 100-200kHz"
VD1: "Bridge Rectifier", Manufacturer_Name="Guangdong Hottech", Height=1.9mm, Manufacturer_Part_Number=MB6S
VD2: "Diode", Manufacturer_Name="Multicomp Pro", Datasheet Link=http://www.farnell.com/datasheets/2863960.pdf, Height=2.62mm, Manufacturer_Part_Number=RS1M
VD3: "Schottky Diode", Manufacturer_Name=onsemi, Mouser Part Number=863-NRVBSS26NT3G, Datasheet Link=https://www.onsemi.com/pub/Collateral/SS26-D.PDF, Height=2.47mm, Manufacturer_Part_Number=NRVBSS26NT3G, Mouser Price/Stock=https://www.mouser.co.uk/ProductDetail/ON-Semiconductor/NRVBSS26NT3G/?qs=xZ%2FP%252Ba9zWqaNJTeScEpd%252Bw%3D%3D
VD4: "Diode", Manufacturer_Name=Nexperia, Mouser Part Number=N/A, Datasheet Link=https://datasheet.datasheetarchive.com/originals/distributors/Datasheets-20/DSA-380039.pdf, Height=1.1mm, Manufacturer_Part_Number=BZX384-C5V6, Mouser Price/Stock=https://www.mouser.com/Search/Refine.aspx?Keyword=N%2FA
VD6: "Diac", Arrow Part Number=TMMDB3TG, Manufacturer_Name=STMicroelectronics, Mouser Part Number=511-TMMDB3TG, Arrow Price/Stock=https://www.arrow.com/en/products/tmmdb3tg/stmicroelectronics?region=nac, Datasheet Link=https://www.st.com/resource/en/datasheet/tmmdb3tg.pdf, Height=1.7mm, Manufacturer_Part_Number=TMMDB3TG, Mouser Price/Stock=https://www.mouser.co.uk/ProductDetail/STMicroelectronics/TMMDB3TG?qs=lgHKUCmDFtju6xjvp%2FOseQ%3D%3D
VT1: "Transistor BJT NPN", Manufacturer_Name="Guangdong Hottech", Datasheet Link=https://doc.hotking.com/wr/specification/specification-en/MMBT5551_SOT-23.pdf, Height=1.15mm, Manufacturer_Part_Number=MMBT5551
VT2: "Triac A", Manufacturer_Name=STMicroelectronics, Mouser Part Number=511-BTA24-800CW, Arrow Part Number=BTA24-800CWRG, Arrow Price/Stock=https://www.arrow.com/en/products/bta24-800cwrg/stmicroelectronics?utm_currency=USD&region=europe, Datasheet Link=http://www.st.com/content/ccc/resource/technical/document/datasheet/da/b9/e2/fa/76/a3/40/9b/CD00002264.pdf/files/CD00002264.pdf/jcr:content/translations/en.CD00002264.pdf, Height=4.6mm, Manufacturer_Part_Number=BTA24-800CWRG, Mouser Price/Stock=https://www.mouser.co.uk/ProductDetail/STMicroelectronics/BTA24-800CWRG?qs=J0fHR8QSRK8TBQKNN3f7Zg%3D%3D
XP1: library part PLS8
XP3: library part "Разъем I2C (4)"
XS1: library part Разъем_1, "Гнездо провод-плата;"
XS2: "1054500101, Разъем USB TYPE-C, USB 3.1, розетка, 24 вывод(-ов), Поверхностный Монтаж, Прямой Угол, Molex"
XS3 XS4: library part Разъем, "Гнездо провод-плата;"
ZQ1: "Crystal or Oscillator", Manufacturer_Name=ABRACON, Mouser Part Number=815-ABMM2-8-E2T, Arrow Part Number=ABMM2-8.000MHZ-E2-T, Arrow Price/Stock=https://www.arrow.com/en/products/abmm2-8.000mhz-e2-t/abracon?utm_currency=USD&region=nac, Datasheet Link=https://abracon.com/Resonators/ABMM2.pdf, Height=1.2mm, Manufacturer_Part_Number=ABMM2-8.000MHZ-E2-T, Mouser Price/Stock=https://www.mouser.co.uk/ProductDetail/ABRACON/ABMM2-8.000MHZ-E2-T?qs=m%252BUhWDcpCfaGlLHGChx47g%3D%3D

## Via types
v1: diameter 0.4, hole 0.2, Top Layer 1 to Bottom Layer 1, tented both sides, 73 vias
v2: diameter 0.8, hole 0.4, Top Layer 1 to Bottom Layer 1, tented both sides, 7 vias

## Nets (pads, with @x,y where several pads share a name; then routed paths per layer and width w, separated by ;. In a path a pad name is that pad's centre, name@x,y a point inside that pad or via, vN(x,y) a via of type N, cw(c..) or ccw(c..) an arc to the next point about the centre after c; other vN are vias at no path point)
DGND: C4.2 C5.2 C6.2 C7.1 C8.2 C9.1 C10.2 C11.2 C12.2 C13.1 C14.1 C15.1 C16.1 C17.1 C18.1 C19.1 C20.1 C22.2 C23.1 DA1.2 DA3.1 DD1.8 DD1.23 DD1.35 DD1.47 DD1.49 DD2.1 R3.1 R6.1 R13.1 R16.2 TV1.5 VD6.2 XP2.3 XP3.1 XS2.A1 ZQ1.2 ZQ1.4 | length 46.2
  Top Layer 1 w0.28: R6.1 v1(87.15,55.982)
  Top Layer 1 w0.35: v1(85.725,55.347) 85.725,56.15 C9.1
  Top Layer 1 w0.5: v1(86.055,73.783) 86.055,74.361 86.095,74.401 R3.1
  Layer1 w0.5: v1(76.581,66.348) 78.991,68.758 v1(80.975,68.758)
  Layer 2 w0.5: v1(85.725,55.347) 85.801,55.27 v1(87.15,55.982)
  Bottom Layer 1 w0.125: DD1.8 79.752,78.339 DD1.49 82.752,81.339 DD1.35 82.752,84.077 v1(83.125,84.45) ; DD1.47 84.788,76.839 84.805,76.855 85.279,76.855 86.055,76.079 v1(86.055,73.783)
  Bottom Layer 1 w0.35: 78.915,66.348 80.5,64.763 C22.2
  Bottom Layer 1 w0.42: 75.075,66.827 C11.2 ; 82.093,70.56 C12.2
  Bottom Layer 1 w0.5: C4.2 74.69,66.442 75.075,66.827 ; v1(76.581,66.348) ZQ1.2 78.915,66.348 ; C18.1 C19.1 81.744,87.347 82.022,87.625 R13.1 ; v1(80.975,68.758) 80.985,68.748 81.28,68.748 ; 82.093,70.56 81.28,69.747 81.28,68.748 ; ZQ1.4 81.28,68.748
NetC1_1: C1.1 C3.1 C4.1 DR1.2 TV1.1 VD1.1 | length 68.7
  Top Layer 1 w0.298: v1(36.678,57.023) 36.684,57.029 DR1.2
  Top Layer 1 w0.5: v2(36.05,62.8) 36.088,62.838 VD1.1 ; C1.1 56.083,77.978 57.633,76.429 57.633,74.721 TV1.1 ; C4.1 59.69,68.961 59.481,69.17 TV1.1 ; C3.1 67.413,84.987 68.453,83.947 68.453,80.518 60.808,72.873 TV1.1
  Layer1 w0.5: v2(36.05,62.8) 36.05,63.259 38.069,65.278 C4.1
  Layer 2 w0.5: v2@36.088,62.8 36.088,57.613 v1(36.678,57.023)
NetC1_2: C1.2 C2.1 DA2.1 DA2.2 DA2.7 DA2.8 VD1.2 | length 40.4
  Top Layer 1 w0.35: 38.588,62.099 41,59.687 41,59.487 41.075,59.412 C2.1
  Top Layer 1 w0.5: 38.588,62.099 VD1.2 ; C2.1 42.774,59.412 43.56,60.198 DA2.2 ; C1.2 43.991,62.56 DA2.1 DA2.2 ; DA2.8 DA2.7 DA2.2
NetC2_2: C2.2 DA1.4 DA2.3 | length 18.8
  Top Layer 1 w0.5: C2.2 43.053,57.912 43.307,57.658 DA2.3 55.16,57.658 57.573,55.245 DA1.4
NetC3_2: C3.2 DR1.8 VD2.1 | length 51.2
  Top Layer 1 w0.5: DR1.8 35.884,59.46 34.813,60.531 34.813,66.359 37.49,69.037 39.624,69.037 40.488,69.901 40.488,79.934 41.453,80.899 54.508,80.899 59.842,86.233 VD2.1 C3.2
NetC5_1: C5.1 C6.1 C7.2 DA3.3 VD3.1 VD4.1 | length 62.9
  Top Layer 1 w0.125: v1(74.016,56.083) 74.016,56.896 74.754,57.634 C7.2 ; VD3.1 77.902,73.332 79.222,74.652 C6.1 81.788,78.232 82.12,78.564 C5.1 85.41,82.169 ; v1(86.974,62.509) 87.173,62.509 87.38,62.302 ; DA3.3 87.38,62.302 ; VD4.1 85.927,82.625 85.471,82.169 85.41,82.169 ; 85.41,82.169 87.757,79.822 87.757,71.145 87.071,70.46 87.071,65.071 87.38,64.762 87.38,62.302
  Layer1 w0.125: v1(74.016,56.083) 77.724,59.792 84.256,59.792 v1(86.974,62.509)
NetC8_1: C8.1 C13.2 C15.2 C16.2 C17.2 C18.2 C19.2 C20.2 DA3.2 DD1.9 DD1.24 DD1.36 DD1.48 DD2.4 R5.2 R7.2 R8.2 R9.2 R11.2 R17.1 R20.1 XP2.1 XP3.2 | length 115.8
  Top Layer 1 w0.125: C8.1 73.153,57.634 v1(73.614,58.095) ; v1(85.09,59.233) DA3.2 ; v1(89.814,59.563) v1(89.814,63.1)
  Layer1 w0.125: v1(74.532,55.567) 75.252,56.286 83.718,56.286 84.607,57.175 84.607,58.75 v1(85.09,59.233) ; v1(85.065,76.339) 86.614,74.79 86.614,73.863 88.138,72.339 v1(88.138,67.361)
  Layer 2 w0.125: v1(84.176,85.039) 84.176,77.228 v1(85.065,76.339) ; v1(87.681,68.428) 89.814,66.294 89.814,65.684 ; v1(88.138,67.361) 89.814,65.684 ; v1(89.814,59.563) v1(89.814,63.1) 89.814,65.684
  Bottom Layer 1 w0.125: C13.2 C16.2 C17.2 ; v1(73.614,58.095) DD2.4 75.59,58.095 75.794,56.824 v1@74.536,55.567 ; XP2.1 73.787,53.238 73.625,53.4 C20.2 73.625,55.067 74.124,55.567 v1@74.536,55.567 ; v1@74.534,55.565 v1@74.536,55.567 ; DD1.24 77.052,84.752 77.475,85.175 77.475,85.783 C17.2 ; R11.2 78,55.493 77.927,55.567 v1@74.536,55.567 ; DD1.9 79.252,73.168 79.93,72.49 82.803,72.49 83.922,73.609 83.922,76.339 DD1.48 v1(85.065,76.339) ; R17.1 82.971,60.817 83.871,59.917 R20.1 85.09,59.917 ; DD1.36 83.252,83.287 83.769,83.804 83.769,84.983 82.906,85.847 ; v1(84.176,85.039) 83.368,85.847 82.906,85.847 ; v1(85.09,59.233) 85.09,59.917 ; R5.2 87.046,69.775 ; v1(87.681,68.428) 87.071,69.037 87.071,69.775 87.046,69.775 ; R8.2 88.587,65.234 88.377,65.024 88.377,63.318 88.595,63.1 R9.2 v1(89.814,63.1) ; R7.2 89.412,68 89.739,68.327 89.739,69.901 89.51,70.129 87.4,70.129 87.046,69.775 ; v1(89.814,59.563) 89.806,59.571 C15.2 88.45,58.994 86.214,58.994 85.291,59.917 85.09,59.917 ; C17.2 C18.2 C19.2 82.906,85.847
NetC9_2: C9.2 DA4.1 L1.2 R15.2 VD5.1 | length 53.5
  Top Layer 1 w0.125: DA4.1 67.259,46.558 67.259,52.426 67.716,52.883 69.698,52.883 71.831,55.016 71.831,59.258 79.426,66.853 ; R15.2 79.426,68.65 79.426,66.853 ; C9.2 84.505,57.65 84.176,57.32 VD5.1 ; v1(86.665,64.313) 85.192,64.313 84.277,63.398 84.277,58.666 VD5.1 ; 79.426,66.853 79.426,60.825 VD5.1
  Bottom Layer 1 w0.125: v1(86.665,64.313) 86.675,64.323 L1.2
NetC10_1: C10.1 DD1.7 | length 18.6
  Layer 2 w0.125: v1(70.484,85.852) 71.37,85.852 79.858,77.365 v1(79.858,74.117)
  Bottom Layer 1 w0.125: v1(70.484,85.852) 70.489,85.847 C10.1 ; v1(79.858,74.117) 80.252,74.512 DD1.7
NetC11_1: C11.1 DD1.6 ZQ1.3 | length 14.3
  Layer 2 w0.125: v1(76.581,68.748) 77.384,68.748 v1(82.042,73.406)
  Bottom Layer 1 w0.125: C11.1 75.565,70.495 ZQ1.3@77.312,68.748 ; v1(76.581,68.748) ZQ1.3@77.312,68.748 ; ZQ1.3 ZQ1.3@77.312,68.748 ; DD1.6 80.752,74.696 v1(82.042,73.406)
NetC12_1: C12.1 DD1.5 ZQ1.1 | length 18.6
  Top Layer 1 w0.125: v1(80.797,73.203) 80.569,72.974 80.569,70.688 81.617,69.64 v1(84.411,69.64)
  Bottom Layer 1 w0.125: v1(80.797,73.203) 81.128,72.873 82.321,72.873 82.601,73.152 82.601,73.762 81.252,75.11 DD1.5 ; ZQ1.1 84.161,66.348 85.275,67.462 C12.1 v1(84.411,69.64)
NetC14_2: C14.2 DD1.22 | length 14
  Top Layer 1 w0.125: v1(75.54,80.442) 76.556,80.442 82.164,86.05 v1(84.811,86.05)
  Bottom Layer 1 w0.125: v1(75.54,80.442) 75.937,80.839 DD1.22 ; v1(84.811,86.05) C14.2
NetC21_1: C21.1 C22.1 DD2.3 XS4.1 | length 19.7
  Bottom Layer 1 w0.125: DD2.3 78.029,59.365 79,60.336 ; 79,65.247 C22.1 C21.1 79,60.336 ; XS4.1 80.874,52.694 80.874,55.085 79,56.958 79,60.336
NetC21_2: C21.2 C23.2 DD2.2 XS4.2 | length 35.6
  Layer1 w0.125: v1(75.794,60.35) 78.664,60.35 v1(80.493,62.179)
  Bottom Layer 1 w0.125: C23.2 66.65,60.8 67.666,59.784 67.666,57.709 68.199,57.175 71.298,57.175 73.584,59.461 73.584,60.35 73.868,60.635 DD2.2 75.509,60.635 v1(75.794,60.35) ; XS4.2 78.762,50.521 80.467,50.521 81.356,51.41 81.356,58.344 80.5,59.2 C21.2 80.5,62.172 v1(80.493,62.179)
NetD1_1: D1.1 DD1.21 | length 45.5
  Bottom Layer 1 w0.125: DD1.21 76.276,80.339 75.651,79.714 74.896,79.714 69.926,84.684 69.926,88.438 70.566,89.078 88.647,89.078 89.256,88.469 89.256,86.665 86.697,84.106 86.697,78.48 87.275,77.902 D1.1
NetD1_2: D1.2 XP1.8 | length 21.2
  Layer 2 w0.125: v1(88.29,73.33) 90.652,70.968 90.652,57.018 XP1.8
  Bottom Layer 1 w0.125: D1.2 87.275,74.345 v1(88.29,73.33)
NetD2_1: D2.1 DD1.41 | length 10.8
  Bottom Layer 1 w0.125: DD1.41 84.226,79.839 84.245,79.858 85.951,79.858 86.318,79.491 86.318,78.198 86.538,77.978 86.538,76.657 86.766,76.429 90.83,76.429 91.05,76.648 D2.1
NetD2_2: D2.2 XP1.7 | length 17.6
  Layer 2 w0.125: v1(91.05,72.72) 91.031,72.702 91.031,58.639 XP1.7
  Bottom Layer 1 w0.125: v1(91.05,72.72) D2.2
NetD3_1: D3.1 DD1.19 | length 42.6
  Bottom Layer 1 w0.125: DD1.19 76.352,79.339 76.312,79.299 74.676,79.299 69.545,84.43 69.545,88.595 70.409,89.459 89.205,89.459 89.637,89.027 89.637,85.623 87.275,83.261 D3.1
NetD3_2: D3.2 XP1.6 | length 21.7
  Top Layer 1 w0.125: v1(89.129,77.012) 89.739,76.402 89.739,64.219 90.331,63.627 90.331,61.339 XP1.6
  Bottom Layer 1 w0.125: D3.2 87.275,78.866 v1(89.129,77.012)
NetD4_1: D4.1 DD1.18 | length 33.6
  Layer1 w0.125: v1(69.571,80.899) 73.152,77.318 79.35,77.318 84.226,82.194 v1(90.475,82.194)
  Bottom Layer 1 w0.125: v1(69.571,80.899) 71.631,78.839 DD1.18 ; v1(90.475,82.194) 91.05,82.194 D4.1
NetD4_2: D4.2 XP1.5 | length 18.9
  Top Layer 1 w0.125: v1(90.526,78.715) 90.526,64.262 90.71,64.078 90.71,62.96 XP1.5
  Bottom Layer 1 w0.125: v1(90.526,78.715) 90.83,78.715 91.05,78.934 D4.2
NetDA1_1: DA1.1 R2.1 R3.2 | length 39.1
  Top Layer 1 w0.125: DA1.1 70.307,55.245 71.145,56.083 71.145,59.919 72.06,60.833 72.06,66.269 79.324,73.533 80.34,73.533 80.543,73.736 81.28,73.736 81.509,73.508 81.509,73.152 81.788,72.873 82.474,72.873 83.566,73.965 83.566,76.048 84.531,77.013 85.725,77.013 86.995,75.743 R3.2 86.995,74.086 86.975,74.066 R2.1
NetDA1_3: DA1.3 DA2.4 | length 15.9
  Top Layer 1 w0.5: DA2.4 47.893,55.118 v2(47.95,55.175) ; v2(56.775,58.875) 57.535,58.875 58.625,57.785 DA1.3
  Layer1 w0.5: v2(47.95,55.175) 51.65,58.875 v2(56.775,58.875)
NetDA2_5: DA2.5 TV1.4 VD2.2
NetDA4_2: DA4.2 R14.1 VT1.3 | length 32.8
  Top Layer 1 w0.125: DA4.2 68.35,47.955 68.612,47.693 70.053,47.693 70.324,47.422 71.374,47.422 73.152,49.2 74.778,49.2 76.606,51.029 76.606,59.646 76.81,59.849 R14.1 77.622,59.849 78.257,60.484 v1(78.257,60.935)
  Layer1 w0.125: v1(70.675,62.687) 76.505,62.687 v1(78.257,60.935)
  Bottom Layer 1 w0.125: v1(70.675,62.687) VT1.3
NetDA4_4: DA4.4 R18.1 VT2.3 | length 29.8
  Top Layer 1 w0.5: R18.1 31.7,51.9 34.646,51.9 VT2.3 40.019,52.025 58.15,52.025 58.65,51.525 DA4.4
NetDA4_6: DA4.6 R19.1 | length 27.8
  Top Layer 1 w0.5: R19.1 32.82,46.355 DA4.6
NetDD1_11: DD1.11 R5.1 XP1.1 | length 18.4
  Layer1 w0.125: XP1.1 v1(91.948,70.675)
  Bottom Layer 1 w0.125: DD1.11 78.252,73.152 79.394,72.01 85.769,72.01 86.725,71.053 R5.1 v1(91.948,70.675)
NetDD1_12: DD1.12 R7.1 XP1.2 | length 19.6
  Layer1 w0.125: v1(77.473,74.905) 82.271,74.905 v1(87.605,69.571) ; v1(89.222,69.503) 90.167,69.503 XP1.2
  Bottom Layer 1 w0.125: v1(77.473,74.905) 77.752,75.184 DD1.12 ; v1(87.605,69.571) 88.275,68.9 88.409,68.9 ; R7.1 88.409,68.9 ; v1(89.222,69.503) 88.621,69.503 88.409,69.291 88.409,68.9
NetDD1_13: DD1.13 R8.1 XP1.3 | length 23.6
  Bottom Layer 1 w0.125: DD1.13 76.81,76.339 76.81,72.923 78.102,71.631 85.494,71.631 86.004,71.12 86.004,68.065 87.935,66.134 R8.1 90.246,66.134 90.658,65.722 XP1.3
NetDD1_14: DD1.14 R9.1 XP1.4 | length 28.1
  Layer1 w0.125: v1(76.018,76.022) 76.018,71.982 76.78,71.22 80.396,71.22 86.272,65.343 90.327,65.343 XP1.4
  Bottom Layer 1 w0.125: v1(76.018,76.022) 76.018,76.429 76.429,76.839 DD1.14 ; R9.1 90.322,64 90.6,63.722 XP1.4
NetDD1_15: DD1.15 DD2.5 | length 25.5
  Bottom Layer 1 w0.125: DD2.5 71.506,58.095 72.771,59.36 72.771,76.098 73.99,77.318 76.61,77.318 76.632,77.339 DD1.15
NetDD1_16: DD1.16 DD2.7 | length 22.2
  Top Layer 1 w0.125: v1(70.383,60.63) 70.155,60.858 70.155,63.678 70.434,63.957 70.434,69.393 72.771,71.73 72.771,75.096 v1(75.514,77.839)
  Bottom Layer 1 w0.125: DD2.7 70.378,60.635 v1(70.383,60.63) ; v1(75.514,77.839) DD1.16
NetDD1_17: DD1.17 DD2.6 R11.1 | length 42.4
  Layer1 w0.125: v1(68.199,59.36) 72.602,54.957 78.96,54.957 v1(79.578,55.575)
  Bottom Layer 1 w0.125: v1(68.199,59.36) 68.204,59.365 68.478,59.365 ; DD2.6 68.478,59.365 ; DD1.17 76.124,78.339 76.003,78.46 70.809,78.46 69.088,76.739 69.088,72.746 68.199,71.857 68.199,59.644 68.478,59.365 ; R11.1 78.9,55.575 v1(79.578,55.575)
NetDD1_32: DD1.32 R12.1 | length 41.1
  Top Layer 1 w0.125: v1(80.239,84.963) 80.239,86.157 81.102,87.02 88.087,87.02 89.916,85.192 89.916,78.842 88.595,77.521 88.595,74.05 88.807,73.838 88.807,71.967 88.671,71.831 88.671,63.144 v1(88.113,62.586)
  Bottom Layer 1 w0.125: v1(80.239,84.963) 81.252,83.95 DD1.32 ; R12.1 87.427,60.817 88.113,61.503 v1(88.113,62.586)
NetDD1_33: DD1.33 R10.1 | length 9.9
  Top Layer 1 w0.125: v1(81.763,84.038) 82.133,83.668 84.658,83.668 v1(86.411,85.42)
  Bottom Layer 1 w0.125: DD1.33 81.752,84.027 v1(81.763,84.038) ; v1(86.411,85.42) 86.411,87.116 86.97,87.675 R10.1
NetDD1_34: DD1.34 XP2.4 | length 44.6
  Layer 2 w0.125: XP2.4 74.905,47.315 74.905,54.966 83.134,63.195 83.134,83.616 v1(82.225,84.525)
  Bottom Layer 1 w0.125: v1(82.225,84.525) 82.225,84.451 82.279,84.396 82.279,83.59 82.252,83.563 DD1.34
NetDD1_37: DD1.37 XP2.2 | length 60.8
  Layer 2 w0.125: XP2.2 72.949,51.035 72.949,56.083 75.082,58.217 75.082,62.687 75.87,63.475 75.87,70.714 76.683,71.526 78.08,71.526 80.391,73.838 80.391,79.096 79.451,80.035 v1(79.451,88.265)
  Bottom Layer 1 w0.125: v1(79.451,88.265) 88.646,88.265 88.849,88.062 88.849,86.893 84.557,82.601 84.557,81.839 DD1.37
NetDD1_40: DD1.40 R4.1 | length 42.3
  Top Layer 1 w0.125: v1(88.646,57.404) 88.65,57.4 R4.1
  Layer1 w0.125: v1(85.877,80.747) 83.541,80.747 79.731,76.937 75.997,76.937 75.502,76.441 75.502,71.742 76.403,70.841 80.239,70.841 86.25,64.829 87.308,64.829 88.646,63.492 v1(88.646,57.404)
  Bottom Layer 1 w0.125: DD1.40 85.47,80.339 v1(85.877,80.747)
NetDD1_42: DD1.42 R17.2 XP3.3 | length 46.9
  Layer 2 w0.125: v1(81.612,60.784) 85.369,64.541 85.369,74.447 85.598,74.676 85.598,76.86 84.709,77.749 v1(84.709,79.339)
  Bottom Layer 1 w0.125: XP3.3 71.984,49.378 82.144,49.378 84.074,51.308 84.074,58.928 83.085,59.917 R17.2 82.093,59.917 81.612,60.398 v1(81.612,60.784) ; DD1.42 v1(84.709,79.339)
NetDD1_43: DD1.43 R20.2 XP3.4 | length 53.5
  Layer1 w0.125: XP3.4 70.866,46.914 73.152,49.2 85.395,49.2 86.36,50.165 86.36,59.69 87.503,60.833 87.503,62.789 86.792,63.5 v1(86.436,63.5)
  Layer 2 w0.125: v1(85.801,78.816) 86.589,78.029 86.589,65.024 85.954,64.389 85.954,63.983 v1(86.436,63.5)
  Bottom Layer 1 w0.125: DD1.43 84.595,78.816 v1(85.801,78.816) ; R20.2 85.014,60.817 86.436,62.239 v1(86.436,63.5)
NetDD1_44: DD1.44 R13.2 | length 44.4
  Layer1 w0.125: v1(72.288,87.173) 86.614,87.173 91.059,82.728 91.059,78.334 90.83,78.105 86.462,78.105 v1(85.877,77.521)
  Bottom Layer 1 w0.125: v1(72.288,87.173) 72.736,86.725 R13.2 ; DD1.44 85.059,78.339 v1(85.877,77.521)
NetDR1_1: DR1.1 DR1.3 | length 4.5
  Top Layer 1 w0.25: DR1.1 35.884,56.381 36.182,56.083 36.97,56.083 37.484,56.597 DR1.3
NetDR1_4: DR1.4 DR1.6 | length 4.8
  Top Layer 1 w0.298: DR1.6 37.484,60.065 v1(37.49,60.071) ; v1(38.284,57.023) DR1.4
  Layer 2 w0.5: v1(37.49,60.071) 38.284,59.277 v1(38.284,57.023)
NetDR1_5: DR1.5 DR1.7 | length 4.3
  Top Layer 1 w0.25: DR1.7 36.684,60.554 37.167,61.036 37.604,61.036 38.075,60.564 38.075,59.768 38.076,59.743 38.284,59.534 DR1.5
NetL1_1: L1.1 R4.2 R6.2 | length 14.2
  Top Layer 1 w0.125: v1(85.75,63.39) 85.989,63.152 85.989,61.001 86.563,60.427 87.986,60.427 90.145,58.268 90.145,56.83 89.814,56.5 R4.2 89.034,56.5 88.05,55.516 R6.2
  Bottom Layer 1 w0.125: L1.1 85.325,63.815 v1(85.75,63.39)
NetR1_1: R1.1 R19.2 VT2.2 XS1.1 | length 70.4
  Top Layer 1 w0.5: v2(28.725,47.675) 28.675,47.725 R19.2 26.65,47.701 26.01,47.701 25.578,48.133 25.578,80.667 XS1.1 38.071,75.184 R1.1
  Layer1 w0.5: v2(28.725,47.675) 28.806,47.675 30.106,46.375 39.869,46.375 VT2.2
NetR1_2: R1.2 VD1.3 | length 8
  Top Layer 1 w0.5: v2(34.3,72.625) 34.302,72.627 34.302,75.182 R1.2 ; v2(37.125,72.625) 37.182,72.568 37.182,72.445 38.588,71.039 VD1.3
  Layer1 w0.5: v2(34.3,72.625) v2(37.125,72.625)
NetR2_2: R2.2 VD4.2 | length 11.7
  Top Layer 1 w0.125: R2.2 86.075,72.421 v1(87.173,71.323) ; v1(89.325,79.259) VD4.2
  Layer 2 w0.125: v1(87.173,71.323) 87.173,77.107 v1(89.325,79.259)
NetR10_2: R10.2 XS2.A6 | length 41.1
  Top Layer 1 w0.125: v1(85.547,56.896) 85.166,56.896 84.963,56.693 84.963,54.935 86.157,53.742 87.017,53.742 XS2.A6
  Layer 2 w0.125: v1(85.547,56.896) 85.547,58.395 87.503,60.35 87.503,64.846 87.147,65.202 87.147,68.783 87.376,69.012 87.859,69.012 88.138,69.291 88.138,70.079 87.757,70.46 87.757,76.708 89.916,78.867 89.916,85.979 v1(88.316,87.579)
  Bottom Layer 1 w0.125: R10.2 87.605,86.775 88.316,87.486 v1(88.316,87.579)
NetR12_2: R12.2 XS2.A7 | length 8.7
  Top Layer 1 w0.125: v1(87.452,59.511) 86.583,58.642 86.583,54.458 86.921,54.121 87.688,54.121 88.017,53.791 XS2.A7
  Bottom Layer 1 w0.125: R12.2 87.046,59.917 v1(87.452,59.511)
NetR14_2: R14.2 VD5.2 | length 3.8
  Top Layer 1 w0.125: R14.2 78.703,58.949 VD5.2
NetR15_1: R15.1 VD6.1 VT1.1 | length 16.1
  Top Layer 1 w0.125: R15.1 79.979,69.55 v1(80.035,69.494)
  Layer1 w0.125: v1(67.208,67.751) 67.21,67.753 69.514,67.753 69.698,67.937 v1(69.725,67.937) 71.282,69.494 v1(80.035,69.494)
  Bottom Layer 1 w0.125: VD6.1 v1(67.208,67.751) ; VT1.1 v1(69.725,67.937)
NetR16_1: R16.1 VT1.2 | length 20.6
  Top Layer 1 w0.125: v1(77.038,70.104) 77.592,69.55 R16.1
  Layer1 w0.125: v1(71.625,67.945) 69.872,66.192 67.945,66.192 66.675,67.462 66.675,69.088 67.691,70.104 v1(77.038,70.104)
  Bottom Layer 1 w0.125: VT1.2 v1(71.625,67.945)
NetR18_2: R18.2 VT2.1 XS3.2 | length 39.4
  Top Layer 1 w0.5: R18.2 29.21,54.21 XS3.2
  Bottom Layer 1 w0.5: XS3.2 34.366,58.5 41.35,58.5 48.27,51.58 VT2.1
NetTV1_8: TV1.8 VD3.2 | length 4.1
  Top Layer 1 w0.125: TV1.8 68.783,72.898 69.217,73.332 VD3.2
NetVD1_4: VD1.4 XS1.2 XS3.1 | length 22.8
  Top Layer 1 w0.5: XS1.2 29.083,67.183 XS3.1 ; v2(31.598,69.444) 36.088,69.444 VD1.4
  Layer1 w0.5: XS3.1 v2(31.598,69.444)
pads on no net: DA3.4 DA4.3 DA4.5 DD1.1 DD1.2 DD1.3 DD1.4 DD1.10 DD1.20 DD1.25 DD1.26 DD1.27 DD1.28 DD1.29 DD1.30 DD1.31 DD1.38 DD1.39 DD1.45 DD1.46 DD2.8 TV1.2 TV1.3 XS2.A2 XS2.A3 XS2.A4 XS2.A5 XS2.A8 XS2.A9 XS2.A10 XS2.A11 XS2.A12 XS2.B1 XS2.B2 XS2.B3 XS2.B4 XS2.B5 XS2.B6 XS2.B7 XS2.B8 XS2.B9 XS2.B10 XS2.B11 XS2.B12 XS2.MH4 XS2.MH5

## Polygon pours and split planes (outlines as drawn)
NetC8_1 on Layer 2 "NETC8_1_L03_P011" (solid, remove dead copper, pour order 11): 92.1,45.1 93,46 93,86.2 89.5,89.7 63.8,89.7 63.8,45.1
NetDA2_5 on Layer 2 "NETDA2_5_L03_P009" (solid, remove dead copper, pour order 9): 24.95,90.125 63.325,90.125 63.325,45.125 24.95,45.125
DGND on Top Layer 1 "DGND_L01_P010" (solid, remove dead copper, pour order 10): 63.9,45.1 92.1,45.1 93,46 93,86.3 92.9,86.3 89.3,89.9 63.9,89.9
NetDA2_5 on Top Layer 1 "NETDA2_5_L01_P008" (solid, remove dead copper, pour order 8): 25,90 63.3,90 63.3,45 25,45
DGND on Bottom Layer 1 "DGND_L04_P005" (solid, remove dead copper, pour order 5): 25,90 93,90 93,45 25,45
NetDA2_5 on Layer1 "NETDA2_5_L02_P002" (solid, remove dead copper, pour order 2): 25,90 63.275,90 63.275,45 25,45
DGND on Layer1 "DGND_L02_P006" (solid, remove dead copper, pour order 6): 64.9,90.015 93.125,90.1 93.125,44.85 93.05,44.775 92.85,44.975 64.9,44.975

## Keep-outs
Keep-Out Layer:
  lines w0.254: 24.917,86.742 24.92,48.439 ccw(c28.58,48.409) 28.58,44.749 89.522,44.675 92.275,44.675 93.425,45.825 93.425,86.425 89.725,90.125 89.55,90.125 28.328,90.125 ccw(c28.3,86.775) 24.95,86.775

## Silkscreen, mask and mechanical layers (free items; w line width, h text height)
Mechanical 7:
  text "BOASFORMAT|А4|1|0|883070867|82677165|1000000000|2:1|" at 0,2540 h0
  text "SET2|Superlayer=MechanicalLayer7|Wsuperlayer=MechanicalLayer8|Layergrid=MechanicalLayer9|Werase=MechanicalLayer11|Layermark=MechanicalLayer12|Layerstamp=MechanicalLayer13|Gridline=0,18|Boardline=0,6|Contourpolygonline=0,6|PcbGridStep=1|PcbGridNumbering=False|PcbGridCleareanceAtView=0|PcbGridNumberEach=l4|PcbGridLineEach=l2|PcbGridCountSecondaryStrip=1|PcbGridEnabledStrip=True|PcbGridHorizontal90=False|PcbGridWhiteAreaBeforeText=True|PcbSignalGridEnabled=True|PcbSignalShowBukva=True|RealSignalLayerNames=False|PcbGridTextsEnabledBothSide=l2|PcbGridEnabledBothSide=l2|PcbPolarGridEnabled=False|PcbPolarGridAngleStep=10|PcbPolarGridRadialStep=10|PcbPolarGridCenterPcbGrid=False|SilkShowPad=True|SilkViewName=Слой маркировки|SilkShowHole=True|SilkShowAxis=True|SilkShowBukva=True|SilkShowGrid=False|SolderShowGrid=False|SolderViewName=Слой маски|SolderShowAxis=False|SolderShowBukva=False|MainViewShowGrid=False|MainViewMinDiameterHoles=2|MainViewUseShapesDrill=False|ShowBukvaOnSboky=True|ShowBukvaViews=True|Density=2,2|CustomHoleSizeFactor=1|PcbDoubleLineHeader=False|PcbAccuracy=a4|TableName=Таблица 1|RazrezWidth=100|RealLayerNames=False|RazrezShowBukva=False|RazrezBukva=В-В|Sher=Rz 160|Asstoplayer=MechanicalLayer1|Asstoplayer2=None|Assbottomlayer=MechanicalLayer2|Assbottomlayer2=None|AssMinDiameterHoles=2|AssDim=False|AssMech=False|AssSilk=False|AssComponentSilk=False|AssFreeSilk=False|AssSmdPads=False|AssGridEnable=False|AssShowBukva=True|Mirror=Horisontal|PcbGridFontSize=5|PcbGridCenterZero=False|TTStampDistance=12|MainFontSize=5|PolyShtrihEnable=True|RegionShtrihEnable=False|PolyStep=2|PcbDrillDrawingGridEnabled=False|PcbDrillDrawingViewName=Слой сверловки|PcbDrillDrawingShowBukva=False|PcbDrillDrawingShowAxis=False|PcbSignalLayersUseDrill=True|PcbSignalLayersUseWhiteHoles=True|PcbSignalLayersUseShapesDrill=False|PcbSignalLayersShowAxis=False|Thinline=0,18|Basicline=0,6" at 0,0.025 h0
  text "STAMP|Разработал|Чурей С. К." at 0,0 h0
  text "STAMP|Компания1|SkillBox" at 0,0 h0
  text "STAMP|Наименование2|с программируемым термопрофилем" at 0,0 h0
  text "STAMP|Наименование1|ПИД-регулятор печи оплавления" at 0,0 h0
  text "BOASVIADRILLTABLE:none,78740,73,|none,157480,7," at 0,0 h0
  text "2BOASDRILLTABLE:none,236220,Да,4,True,|none,275591,Да,10,True,|none,334646,Да,8,True,|none,393701,Да,8,True,|none,433071,Да,6,True,|none,708661,Да,3,True," at 0,0 h0
  text "2STAMP|Разработал|Чурей С. К." at 0,0 h0
  text "2STAMP|Компания1|SkillBox" at 0,0 h0
  text "2STAMP|Наименование2|с программируемым термопрофилем" at 0,0 h0
  text "2STAMP|Наименование1|ПИД-регулятор печи оплавления" at 0,0 h0
Mechanical 13:
  lines w0.18: 20,2253 85,2253 ; 20,2258 85,2258 ; 20,2263 85,2263 ; 20,2268 85,2268 ; 20,2273 85,2273 ; 20,2288 85,2288 ; 20,2293 85,2293 ; 20,2298 85,2298 ; 159.96,2268 159.96,2283 ; 164.98,2268 164.98,2283 ; 181.7,2522.1 184.8,2516.7 190.4,2526.5 ; 0,2243 210,2243 210,2540 0,2540 0,2243
  lines w0.6: 8,2273 20,2273 ; 8,2308 20,2308 ; 8,2333 20,2333 ; 8,2358 20,2358 ; 8,2475 20,2475 ; 13,2248 13,2393 ; 13,2415 13,2535 ; 20,2278 85,2278 ; 20,2283 85,2283 ; 20,2393 8,2393 8,2248 20,2248 ; 20,2415 8,2415 8,2535 20,2535 ; 20,2521 90,2521 90,2535 ; 27,2278 27,2303 ; 37,2248 37,2303 ; 60,2248 60,2303 ; 75,2248 75,2303 ; 85,2248 85,2303 205,2303 ; 85,2263 155,2263 205,2263 ; 85,2288 205,2288 ; 142,2524 147,2515 154.6,2529 ; 154.7,2529 197,2529 ; 155,2248 155,2288 ; 155,2268 205,2268 ; 155,2283 170,2283 205,2283 ; 170,2268 170,2288 ; 175.57,2263 175.57,2268 ; 187,2268 187,2288 ; 205,2311 205,2303 ; 20,2248 20,2303 205,2303 ; 20,2248 205,2248 205,2535 20,2535 ; 20,2248 20,2535
  text "Rz 160" at 154.7,2516.7 h10.75
  text "(" at 178,2516.7 h10.75
  text ")" at 189,2516.7 h10.75
  text "Перв. примен." at 12.037,2494.974 h5.38 r90
  text "Справ. №" at 12.037,2437.498 h5.38 r90
  text "Подп. и дата" at 12.037,2365.566 h5.38 r90
  text "Инв. № дубл." at 12.037,2336.08 h5.38 r90
  text "Взам. инв. №" at 12.037,2311.101 h5.38 r90
  text "Лит." at 159.194,2283.963 h5.38
  text "Масса" at 173.914,2283.963 h5.38
  text "Масштаб" at 188.834,2283.963 h5.38
  text "Подп. и дата" at 12.037,2281.066 h5.38 r90
  text "ПИД-регулятор печи оплавления" at 85.501,2280.942 h7.2
  text "Изм." at 20.571,2278.963 h5.38
  text "Лист" at 27.856,2278.963 h5.38
  text "№ докум." at 41.998,2278.963 h5.38
  text "Подп." at 63.772,2278.963 h5.38
  text "Дата" at 75.793,2278.963 h5.38
  text "Разраб." at 20.533,2273.771 h5.38
  text "Чурей С. К." at 37.68,2273.771 h5.38
  text "4 г" at 175.053,2273.303 h7.68
  text "2:1" at 192.788,2273.303 h7.68
  text "с программируемым термопрофилем" at 85.504,2273.116 h6.59
  text "Пров." at 20.533,2268.771 h5.38
  text "Т.контр." at 20.533,2263.771 h5.38
  text "Лист" at 156.442,2263.771 h5.38
  text "Листов" at 177.485,2263.771 h5.38
  text "1" at 197.397,2263.771 h5.38
  text "Н.контр." at 20.533,2253.771 h5.38
  text "SkillBox" at 171.283,2253.303 h7.68
  text "Инв. № подл." at 12.037,2251.08 h5.38 r90
  text "Утв." at 20.533,2248.771 h5.38
  text "Копировал" at 95.533,2243.771 h5.38
  text "Формат А4" at 176.401,2243.771 h5.38